# Altium PCB TC-temp-logger-base.PcbDoc (part 1 of 5)
Units mil, origin at the board's own origin, x right, y up, seen from the top; angles counter-clockwise.
Board outline 6370.08 x 6889.76 mil, 4 copper layers (Top Layer, Layer 2, Layer 1, Bottom Layer), stack 61.581 mil thick; 216 components, 163 nets, 792 pads, 3713 vias.
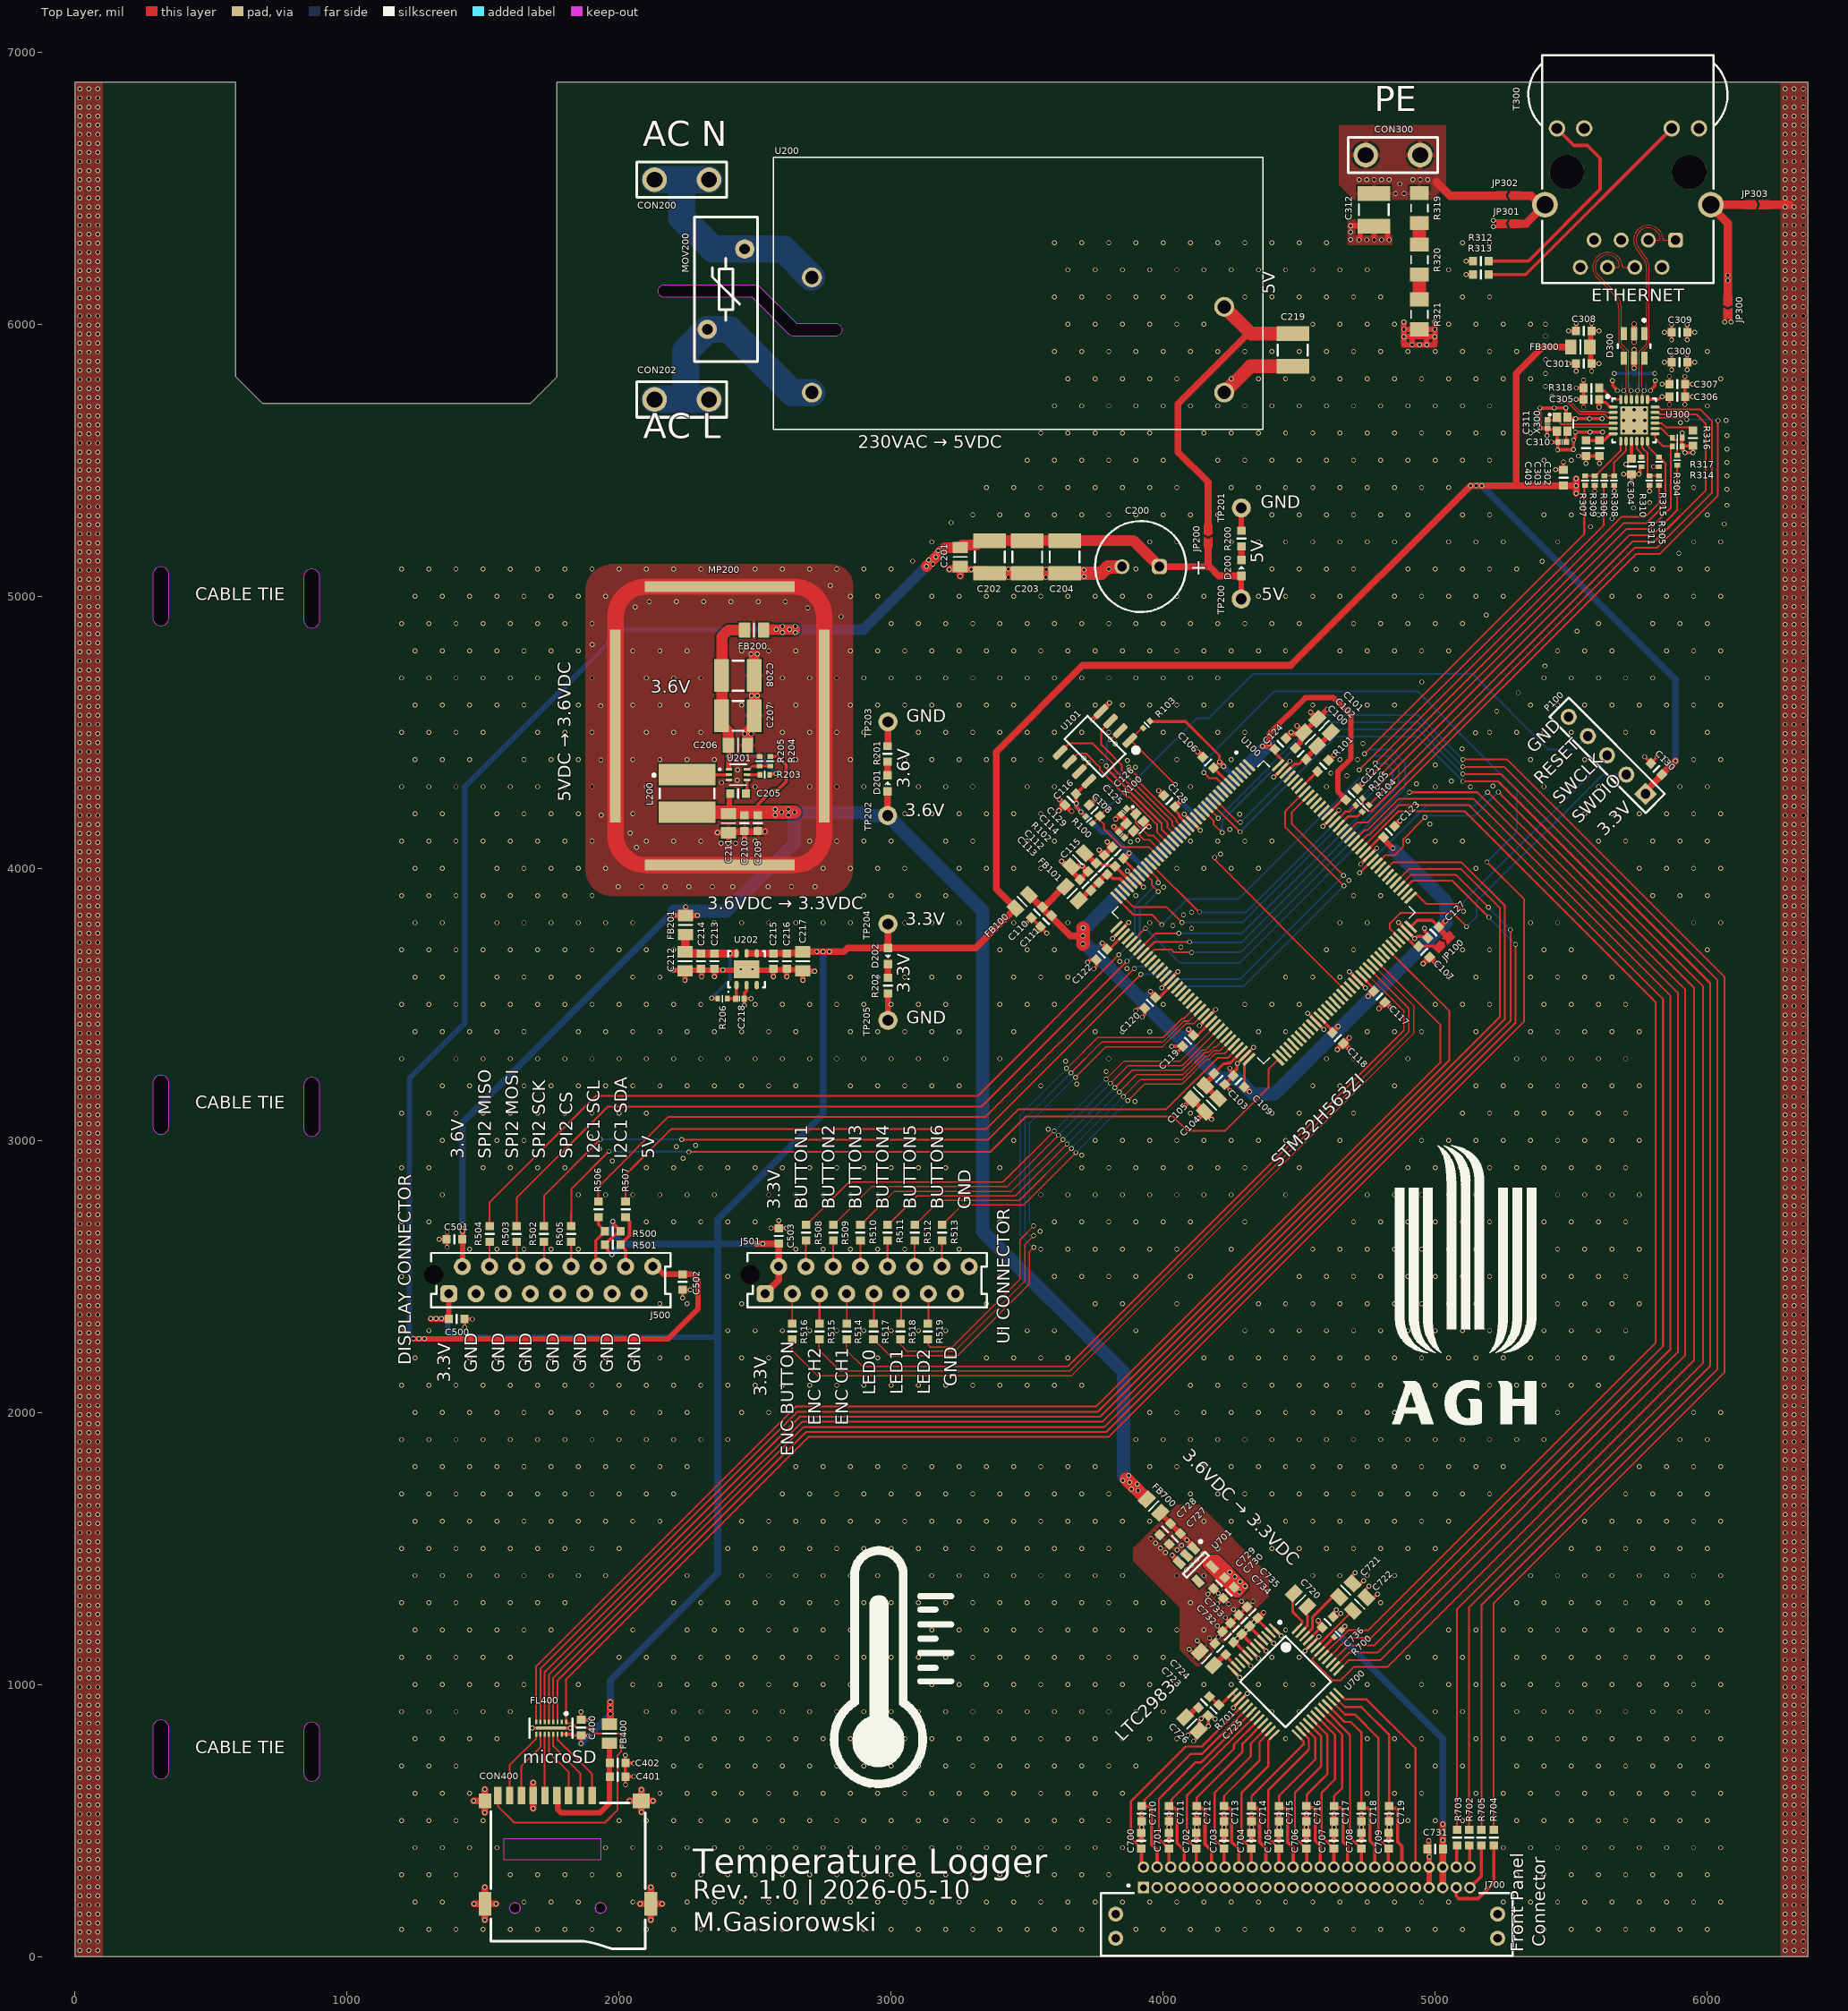
[diagram p0: Top Layer view]
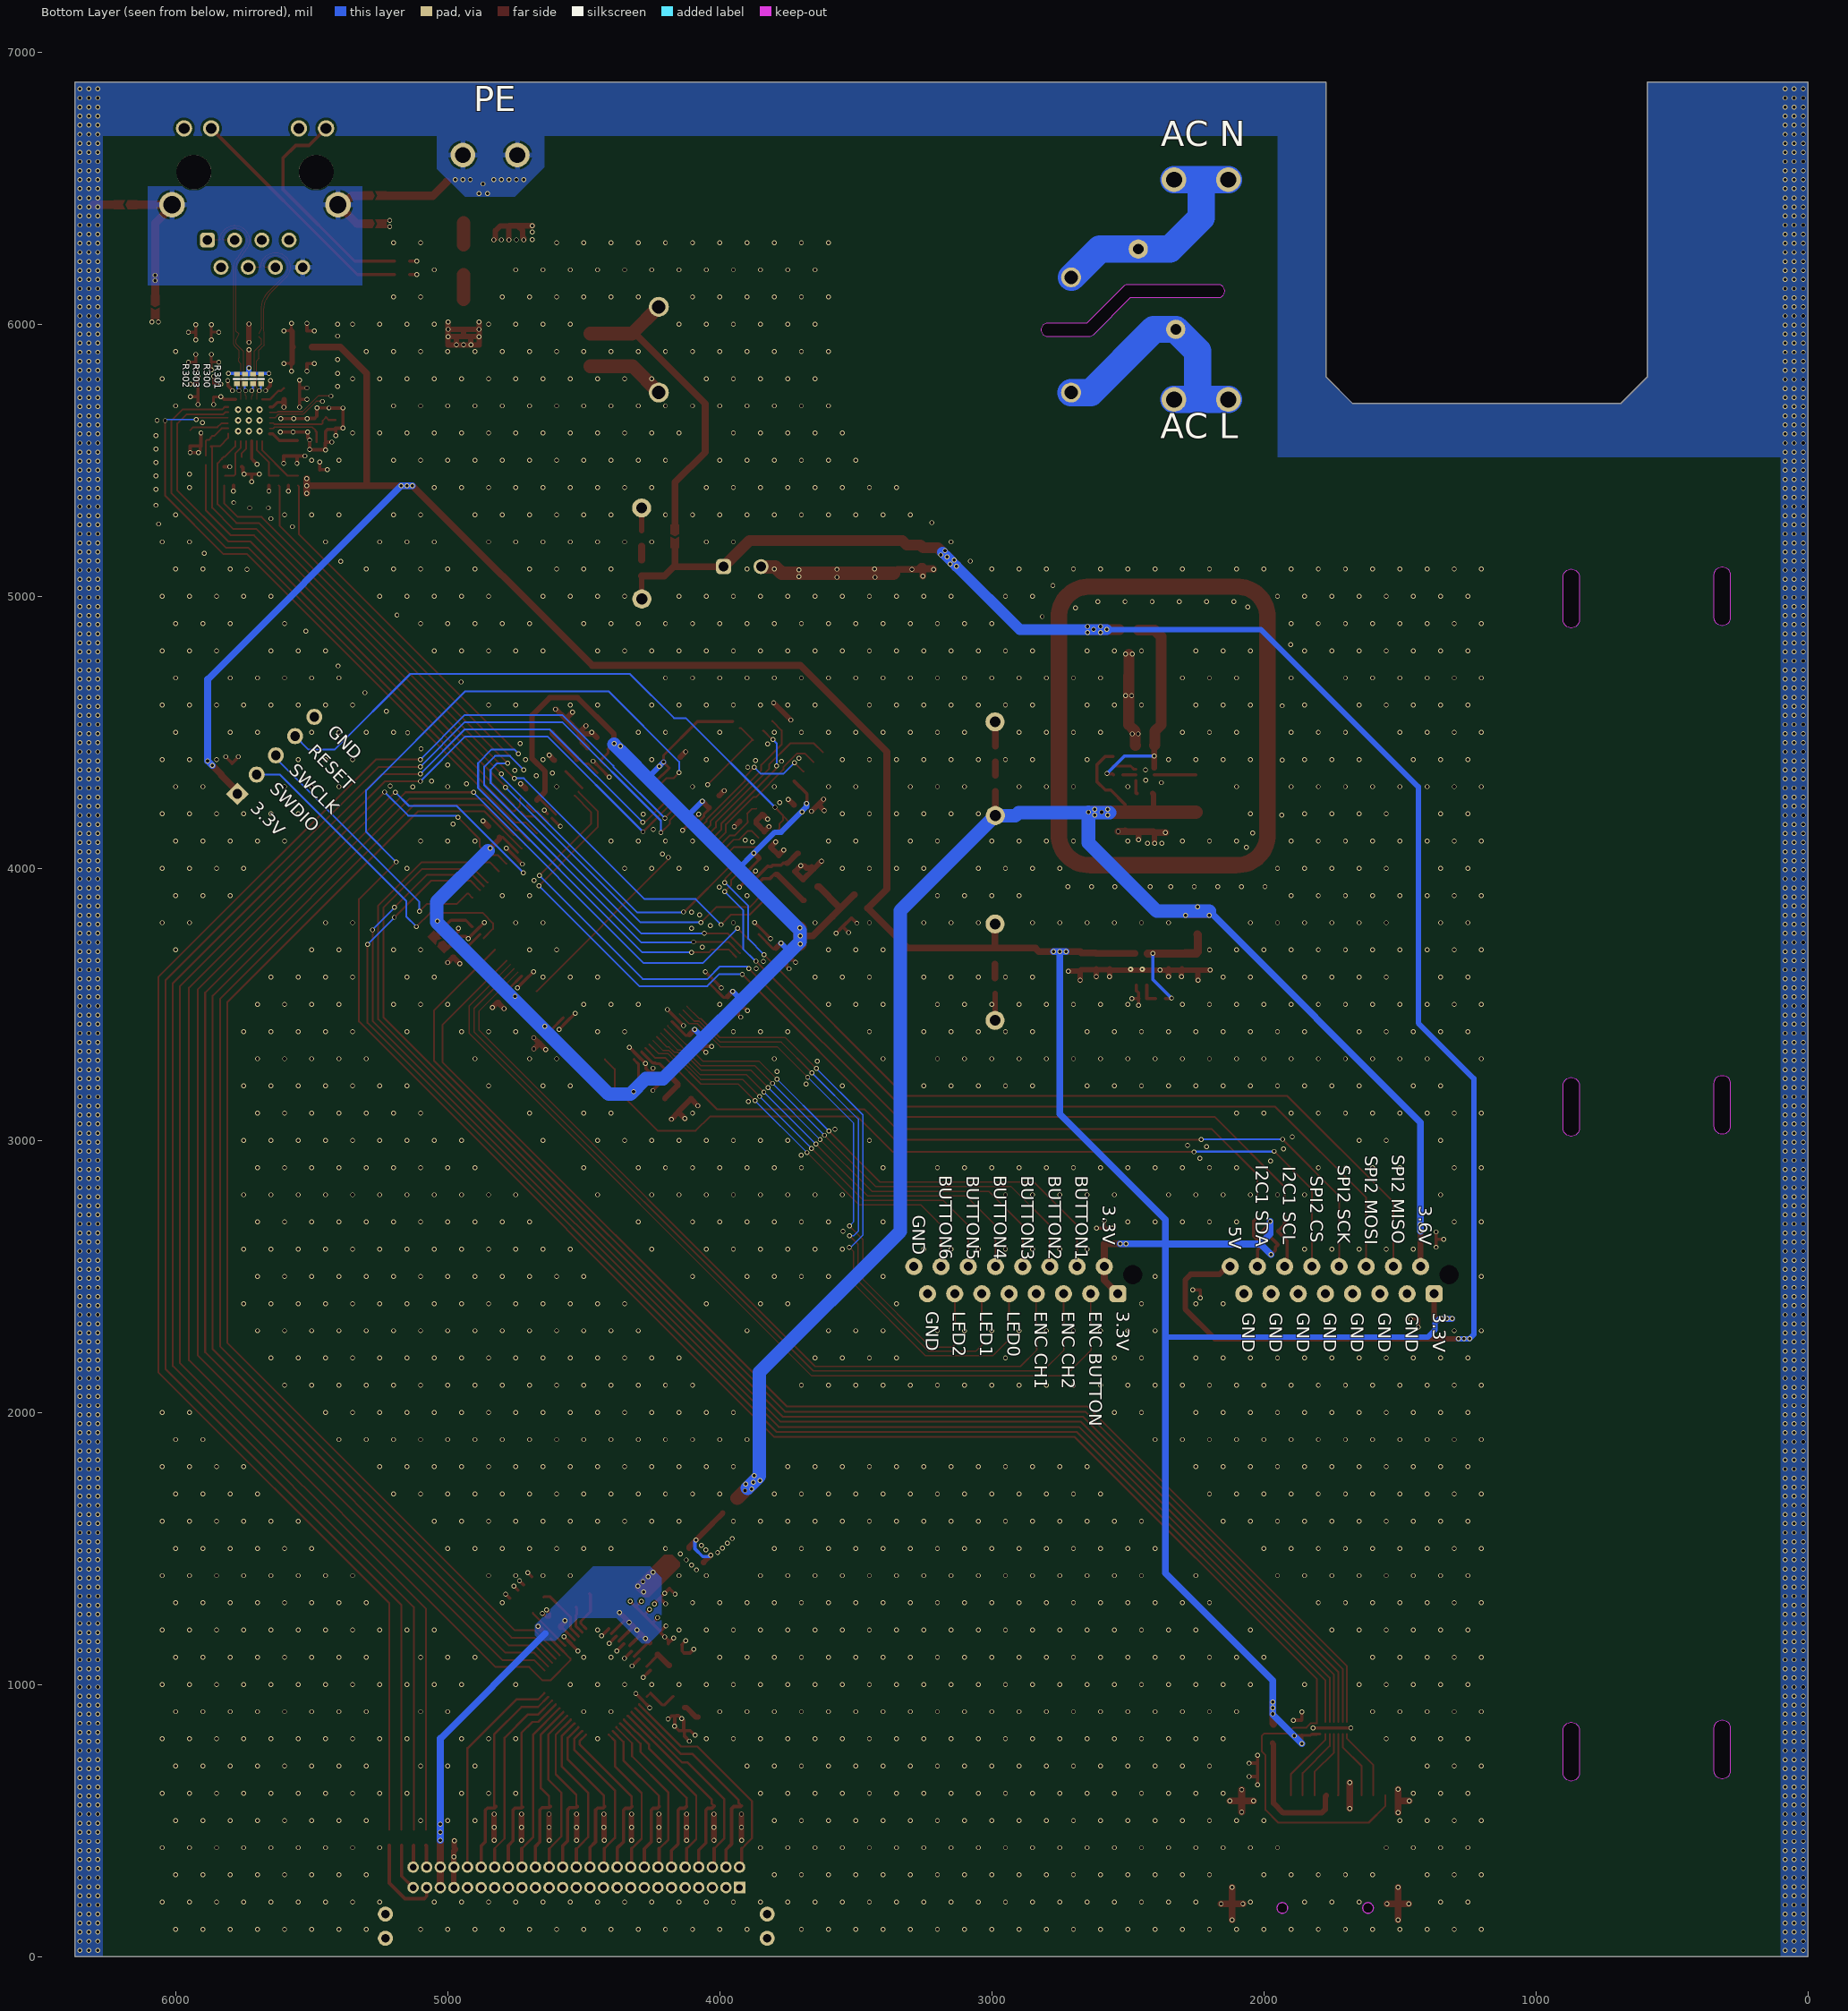
[diagram p1: Bottom Layer view, seen from below]
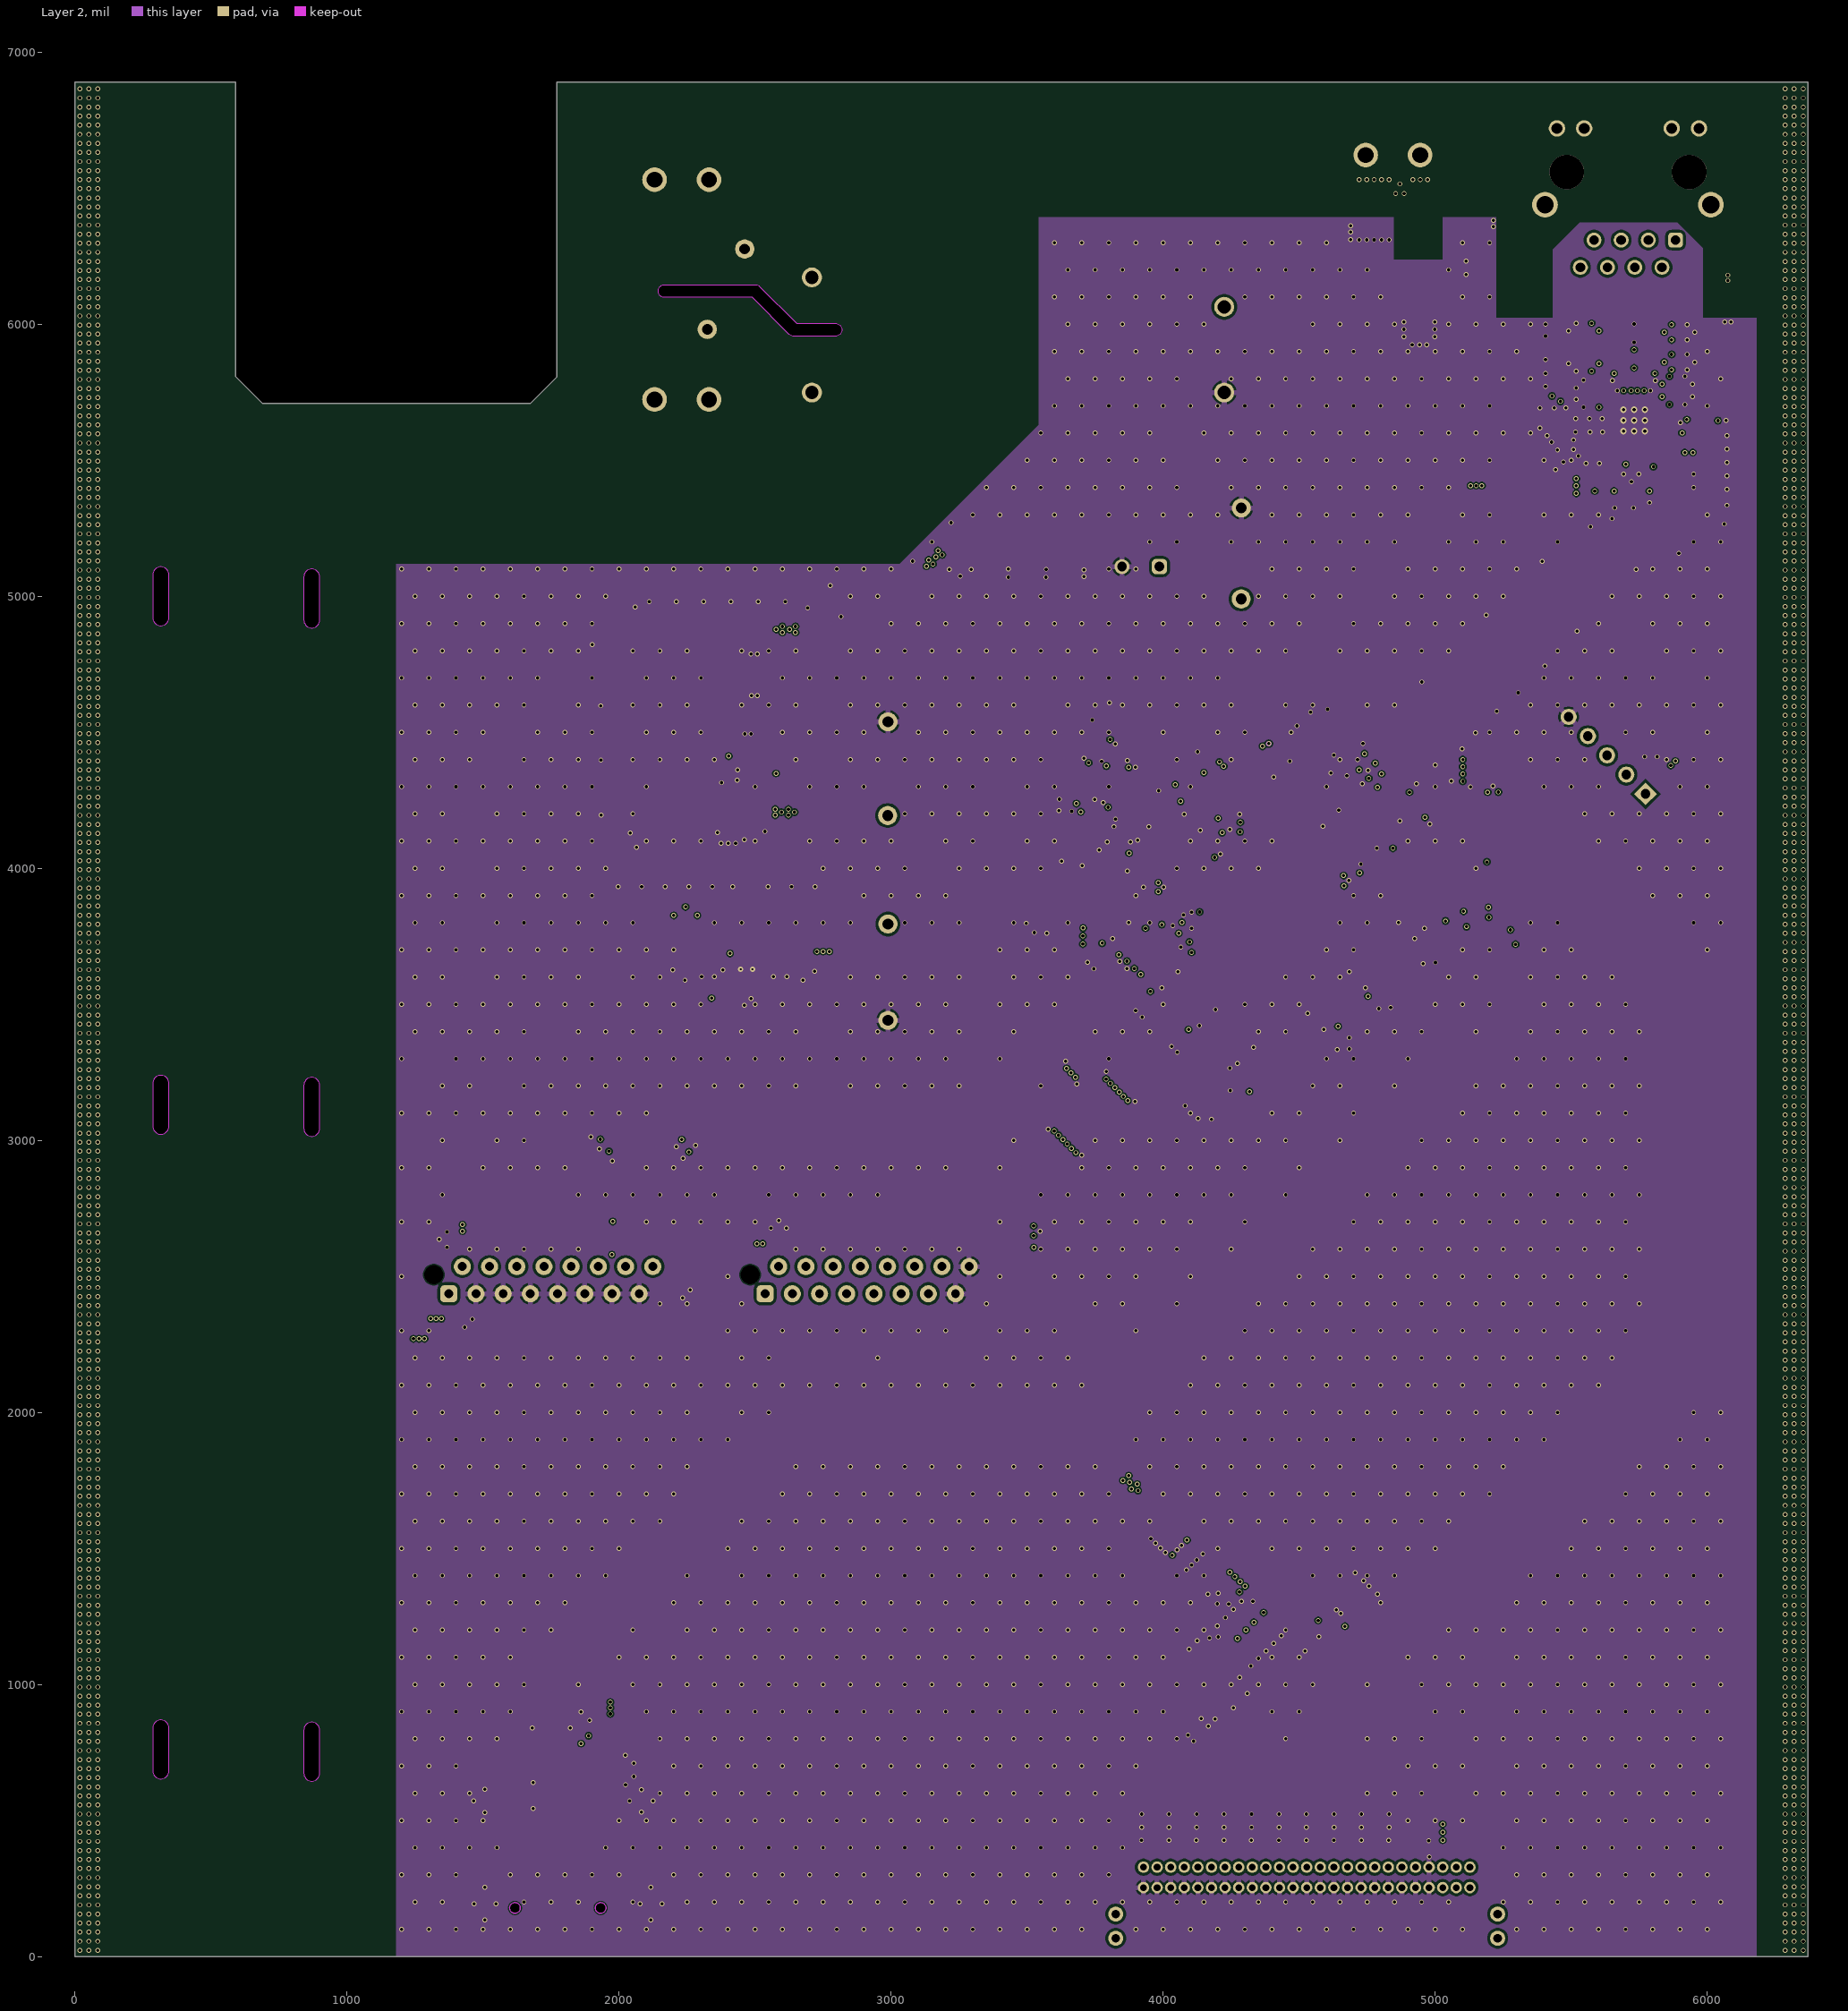
[diagram p2: Layer 2]
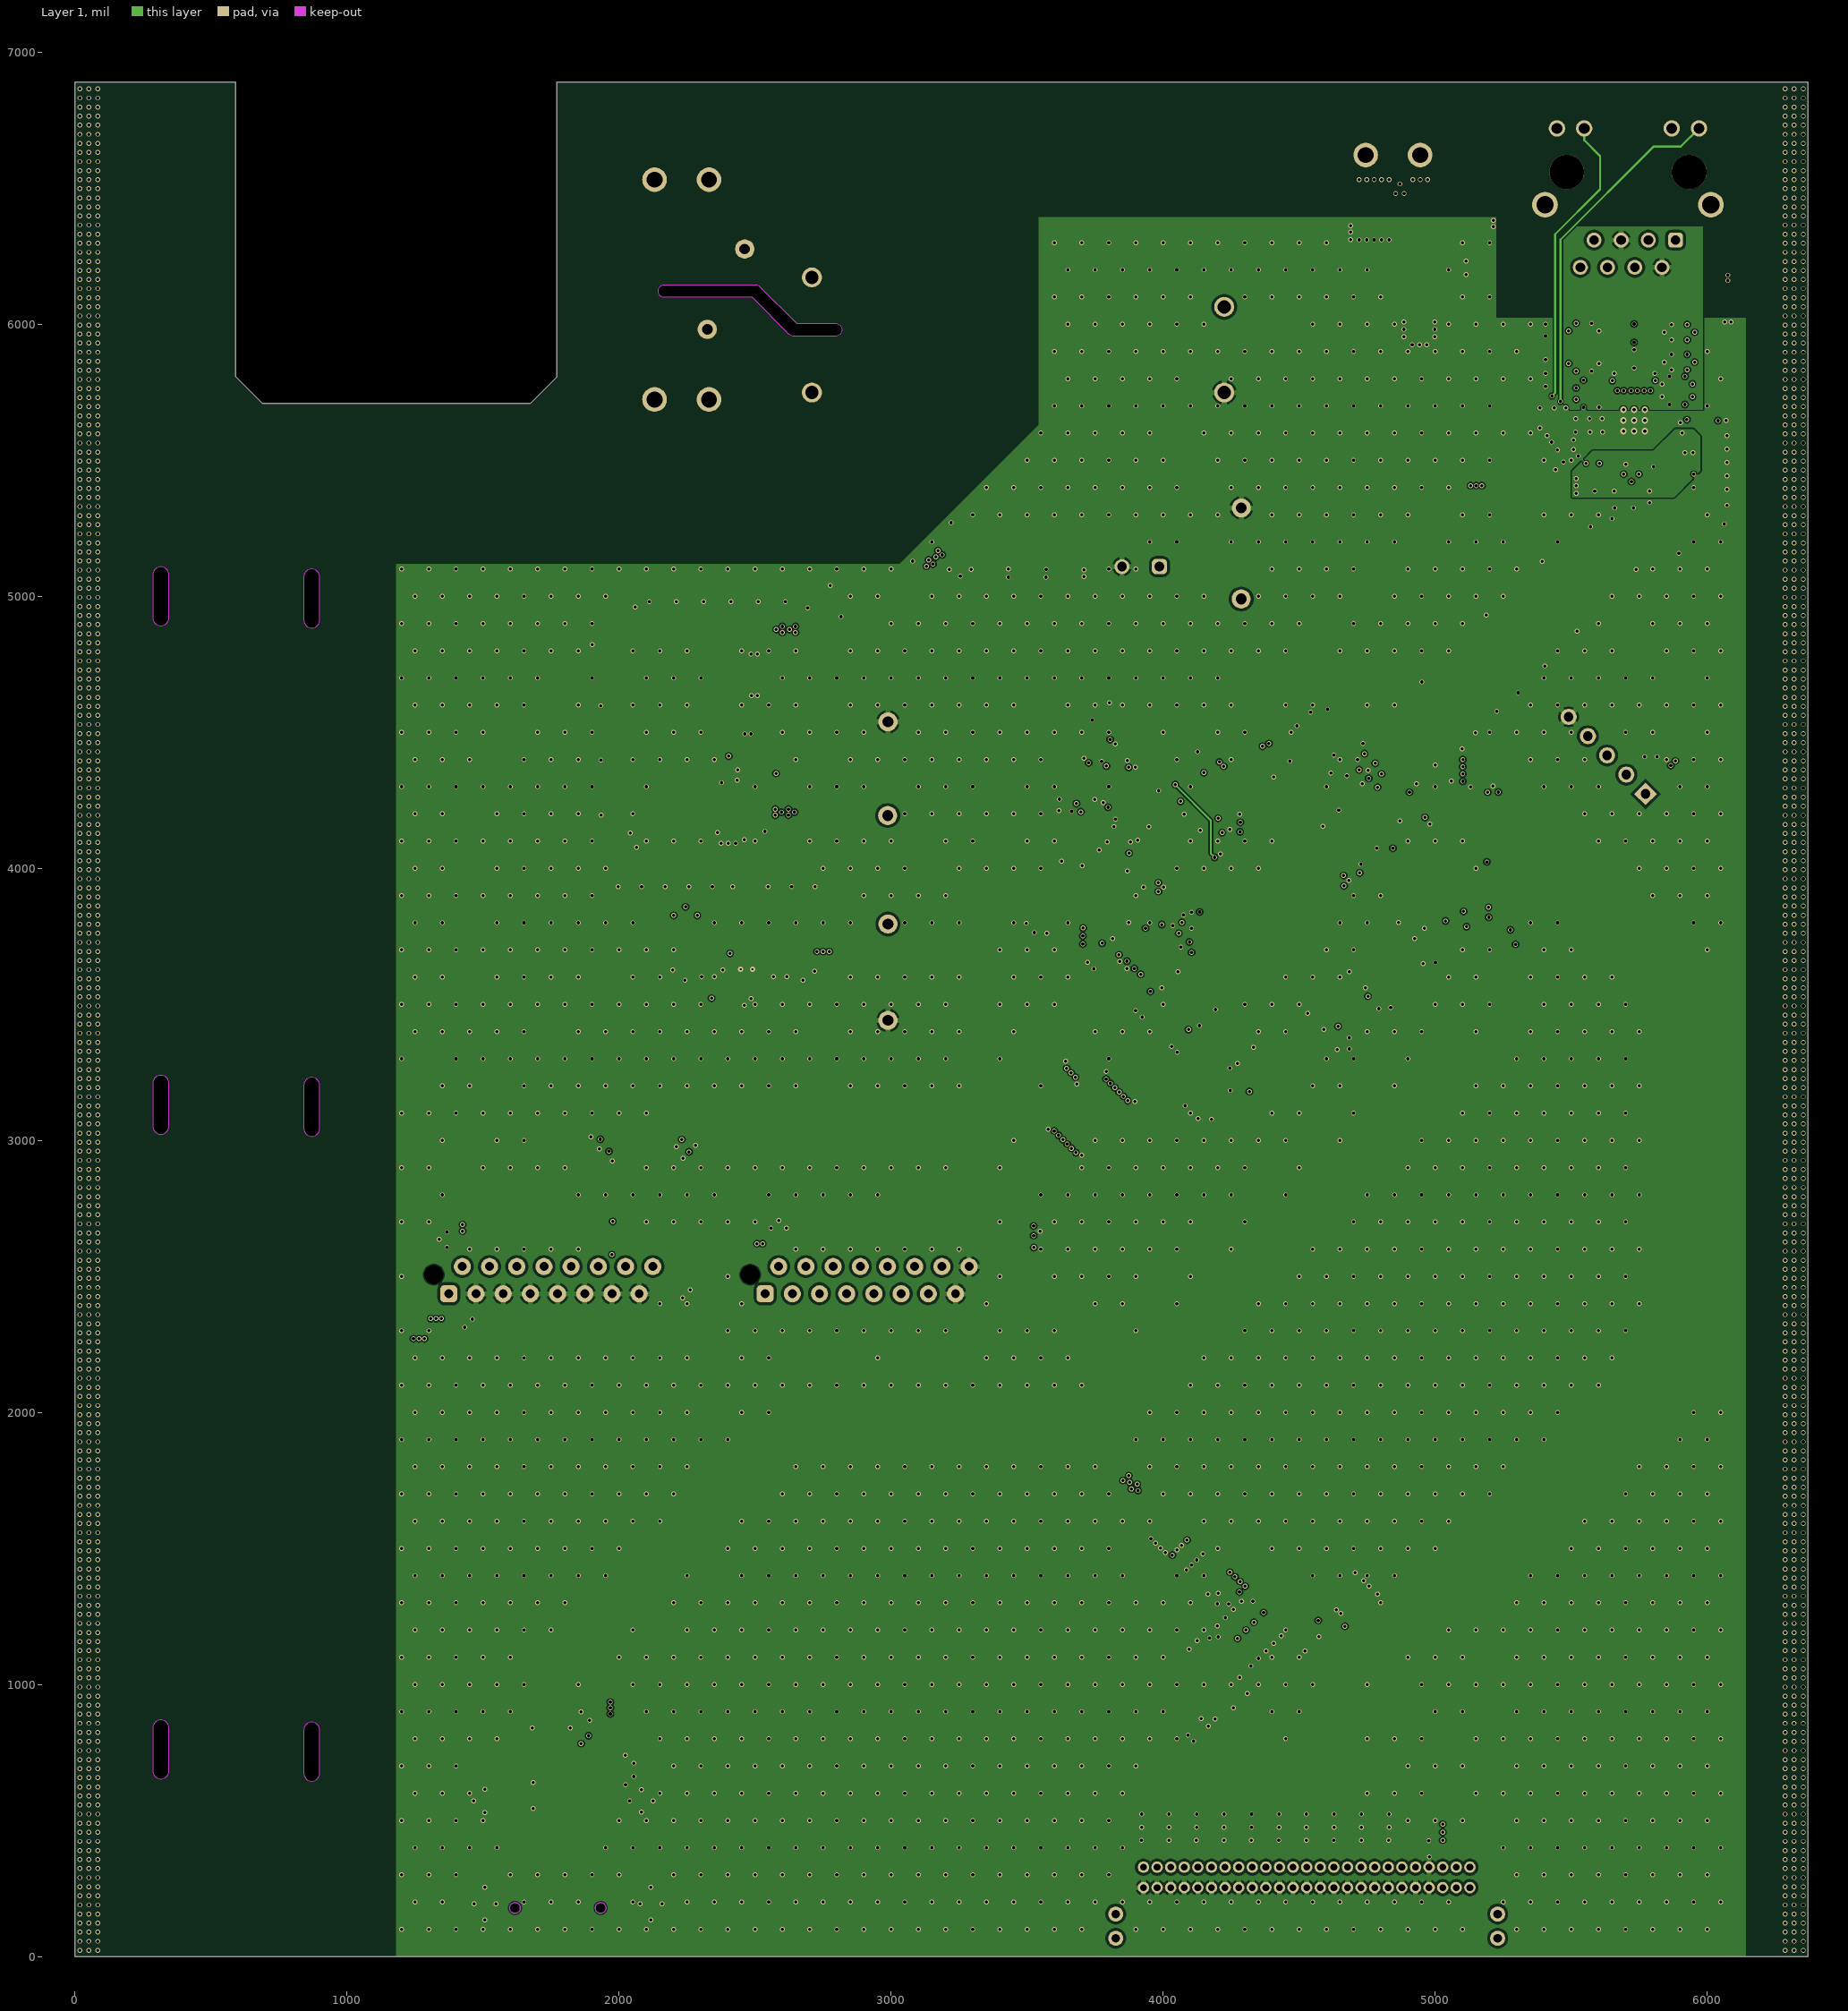
[diagram p3: Layer 1]
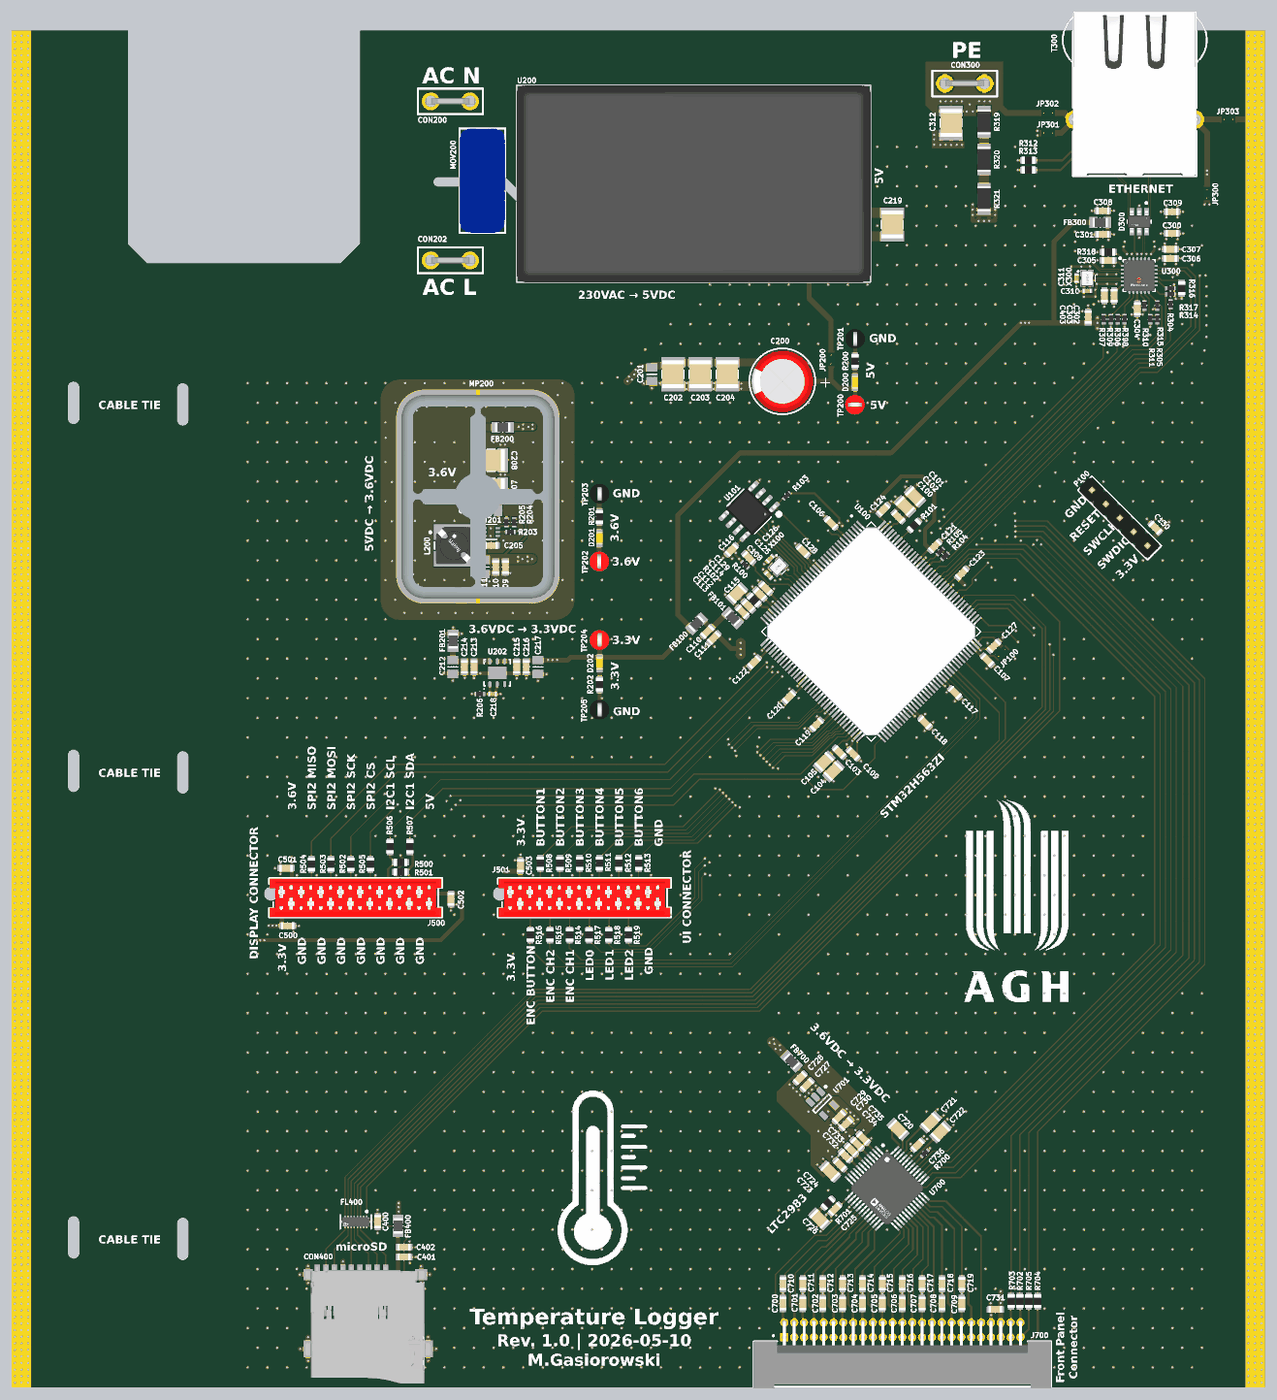
[diagram p7: 3D render of the assembled board from above, using the file's embedded part models]
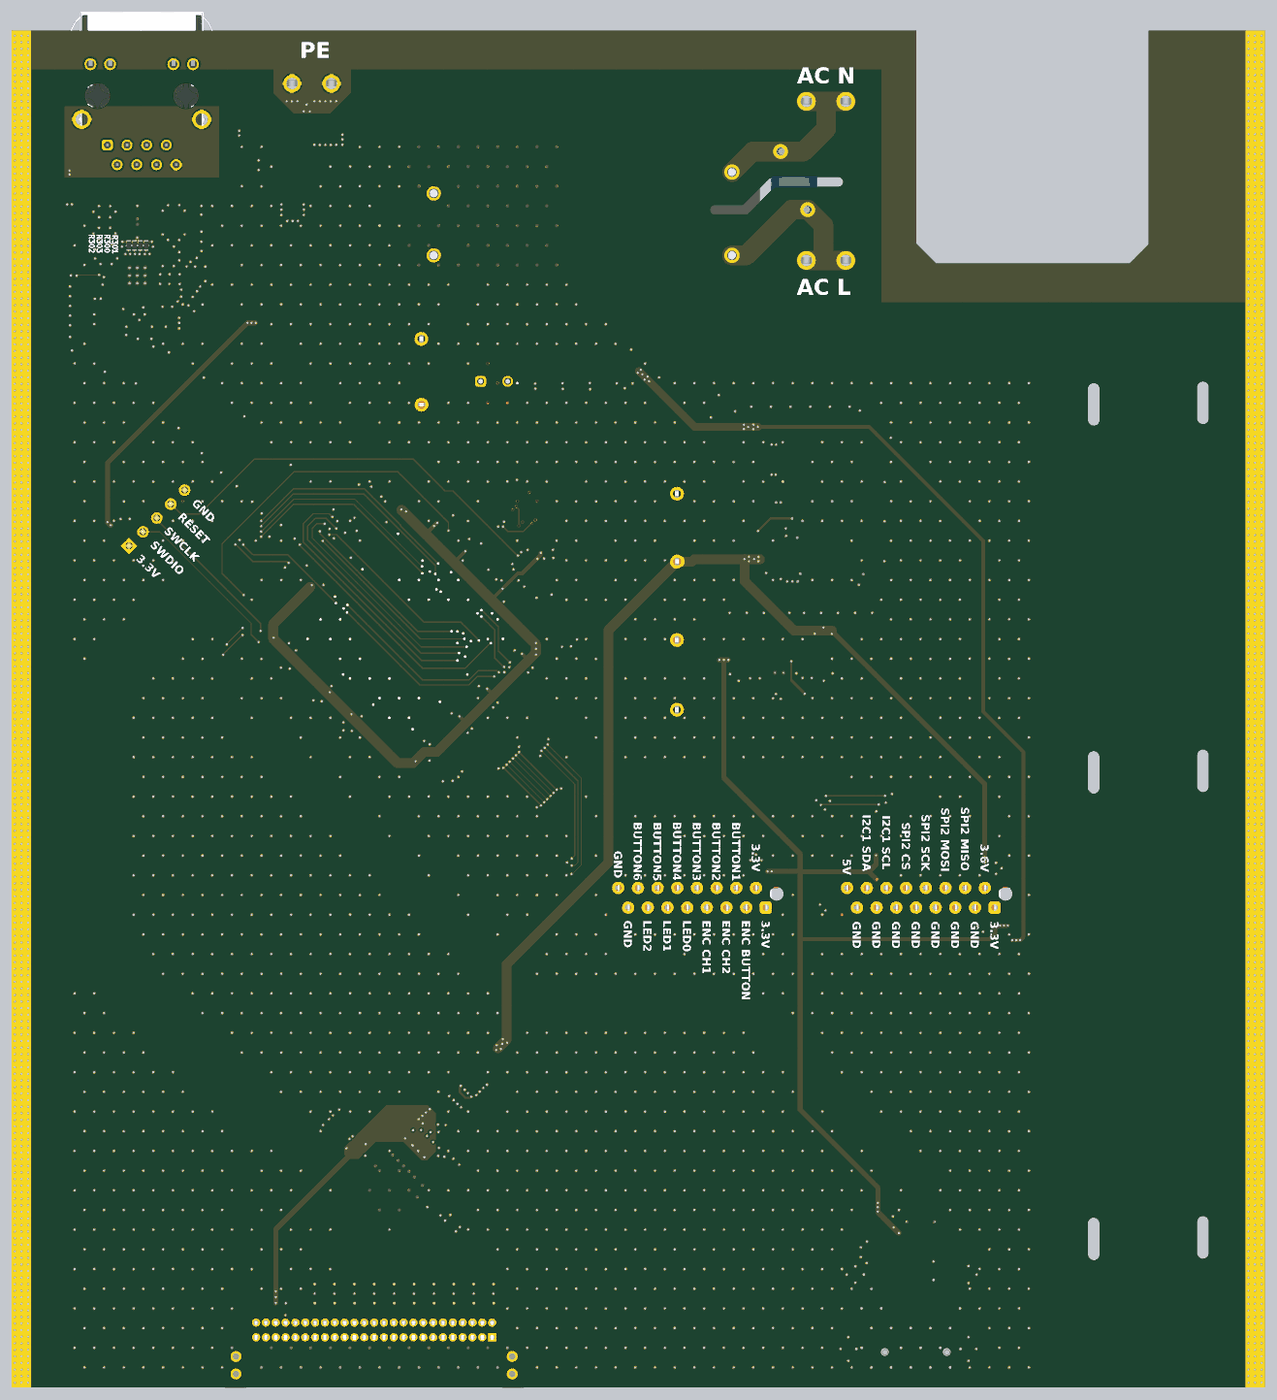
[diagram p8: 3D render of the assembled board from below, using the file's embedded part models]

## Layer stack, top to bottom
Top Solder: solder mask 0.5, Solder Resist, Dk 3.8
Top Layer: signal copper 1.378
Dielectric 1: prepreg 3.913, 3313, Dk 4.1
Layer 2: signal copper 0.598
Core 1: core 49.803, FR-4, Dk 4.5
Layer 1: signal copper 0.598
Dielectric 2: prepreg 3.913, 3313, Dk 4.1
Bottom Layer: signal copper 1.378
Board Layer Stack Bottom Solder: solder mask 0.5, Solder Resist, Dk 3.8

## Board outline
0,0 0,6889.76 590.55,6889.76 590.55,5807.09 688.98,5708.66 1673.23,5708.66 1771.65,5807.09 1771.65,6889.76 6370.08,6889.76 6370.08,0
cut-out: 2167.32,6098.41 cw(c2167.32,6122.05) 2167.32,6145.68 2500,6145.68 cw(c2500,6122.05) 2516.71,6138.76 2652.02,6003.45 2795.28,6003.45 cw(c2795.28,5979.81) 2818.91,5979.81 cw(c2795.28,5979.81) 2795.28,5956.18 2642.23,5956.18 cw(c2642.23,5979.81) 2625.52,5963.1 2490.21,6098.41
cut-out: 840.54,3044.18 ccw(c870.08,3044.18) 899.62,3044.18 899.62,3201.66 ccw(c870.08,3201.66) 840.54,3201.66
cut-out: 285.42,3052.06 ccw(c314.96,3052.06) 344.5,3052.06 344.5,3209.54 ccw(c314.96,3209.54) 285.42,3209.54
cut-out: 840.54,674.3 ccw(c870.08,674.3) 899.62,674.3 899.62,831.78 ccw(c870.08,831.78) 840.54,831.78
cut-out: 285.42,682.18 ccw(c314.96,682.18) 344.5,682.18 344.5,839.66 ccw(c314.96,839.66) 285.42,839.66
cut-out: 285.42,4921.26 ccw(c314.96,4921.26) 344.5,4921.26 344.5,5078.74 ccw(c314.96,5078.74) 285.42,5078.74
cut-out: 840.54,4913.39 ccw(c870.08,4913.39) 899.62,4913.39 899.62,5070.87 ccw(c870.08,5070.87) 840.54,5070.87

## Design rules (kind name [scope] priority, off if disabled: settings)
Clearance [All] p1: gap=5 ignorepadtopadclearanceinfootprint=FALSE except(3.15: Arc-SMDPad Track-SMDPad; 3.94: SMDPad-SMDPad; 4: Arc-Arc Arc-Track Arc-Text Arc-Hole Track-Track Track-Text Track-Hole SMDPad-Text SMDPad-Hole THPad-Text THPad-Hole Via-Text Via-Hole Fill-Text Fill-Hole Poly-Text Poly-Hole Region-Text Region-Hole Text-Text Text-Hole; 4.72: THPad-THPad; 4.88: Arc-Via Track-Via SMDPad-Via THPad-Via Via-Via; 7.87: Arc-THPad Track-THPad SMDPad-THPad; 10: THPad-Fill THPad-Poly THPad-Region)
ComponentClearance [All] p1: gap=7.87 collisioncheckmode=3 verticalgap=7.87 showdistances=FALSE
DiffPairsRouting [All] p1: maxlimit=5 minlimit=5 mostfreqgap=5 toplayer_minwidth=3.98 toplayer_maxwidth=3.98 toplayer_prefwidth=3.98 midlayer1_minwidth=3.71 midlayer1_maxwidth=3.71 midlayer1_prefwidth=3.71 midlayer2_minwidth=3.03 midlayer2_maxwidth=3.03 midlayer2_prefwidth=3.03 bottomlayer_minwidth=3.98 bottomlayer_maxwidth=3.98 bottomlayer_prefwidth=3.98 impedanceprofiledriven=TRUE impedanceprofileid={BE86F7EC-61BB-4EF0-B714-61C3064F6A90} impedanceprofilevalue=100.000000 maxuncoupledlength=500
HoleSize [All] p1: absolutevalues=TRUE maxlimit=314.96 minlimit=5.91 maxpercent=80.000 minpercent=20.000
HoleSize Testpoint [All] p2: absolutevalues=TRUE maxlimit=100 minlimit=1 maxpercent=80.000 minpercent=20.000
HoleSize TestPointUsage [All] p3: absolutevalues=TRUE maxlimit=100 minlimit=1 maxpercent=80.000 minpercent=20.000
HoleToHoleClearance [All] p1: gap=7.87 allowstackedmicrovias=TRUE
MinimumAnnularRing MinimumAnnularRing_via [IsVia] p1: minimumring=2.95
MinimumAnnularRing [All] p2: minimumring=5.12
MinimumSolderMaskSliver [All] p1: minsoldermaskwidth=0
PlaneClearance [All] p1: clearance=10
PolygonConnect [All] p1: thpad.connectstyle=Relief thpad.reliefconductorwidth=20 thpad.reliefentries=4 thpad.polygonreliefangle="90 Angle" thpad.airgapwidth=8 smdpad.connectstyle=Relief smdpad.reliefconductorwidth=12 smdpad.reliefentries=4 smdpad.polygonreliefangle="90 Angle" smdpad.airgapwidth=6 via.connectstyle=Direct via.reliefconductorwidth=20 via.reliefentries=4 via.polygonreliefangle="45 Angle" via.airgapwidth=10
RoutingVias [All] p1: holewidth=11.81 width=17.72 viastyle="Through Hole" minholewidth=11.81 minwidth=11.81 maxholewidth=118.11 maxwidth=236.22
SilkToSilkClearance [All] p1: silktosilkclearance=3.94
SilkToSolderMaskClearance [IsPad] p1: minsilkscreentomaskgap=2.13 clearancetoexposedcopper=TRUE
SolderMaskExpansion SolderMaskExpansion_VIA [IsVia] p1: expansion=4 istentingtop=TRUE
SolderMaskExpansion [All] p2: expansion=2 istentingtop=FALSE
SupplyNets "Schematic Supply Nets_7" [InNet('5V-PS')] p1: voltage=0.000
SupplyNets "Schematic Supply Nets_6" [InNet('3V3-LTC')] p2: voltage=0.000
SupplyNets "Schematic Supply Nets_5" [InNet('3V6')] p3: voltage=0.000
SupplyNets "Schematic Supply Nets_4" [InNet('GND')] p4: voltage=0.000
SupplyNets "Schematic Supply Nets_3" [InNet('SHGND')] p5: voltage=0.000
SupplyNets "Schematic Supply Nets_2" [InNet('AC_PE')] p6: voltage=0.000
SupplyNets "Schematic Supply Nets_1" [InNet('VDD-3V3')] p7: voltage=0.000
SupplyNets "Schematic Supply Nets" [InNet('3V3-STM32')] p8: voltage=0.000
Width Width_50Ohm [InNetClass('50')] p1: maxlimit=14.47 minlimit=3.5 preferedwidth=14.47
Width [All] p2: maxlimit=250 minlimit=3.5 preferedwidth=8 minimp=40.000000 maximp=100.000000 favimp=52.000000
22 further rules are at their usual default settings.

## Classes and differential pairs
component class LTC-SHEET: C700 C701 C702 C703 C704 C705 C706 C707 C708 C709 C710 C711 C712 C713 C714 C715 C716 C717 C718 C719 C720 C721 C722 C723 C724 C725 C726 C727 C728 C729 C730 C731 C732 C733 C734 C735 C736 FB700 J700 R700 R701 R702 R703 R704 R705 U700 U701
component class SD-SHEET: C400 C401 C402 C403 CON400 FB400 FL400
component class PS-SHEET: C200 C201 C202 C203 C204 C205 C206 C207 C208 C209 C210 C211 C212 C213 C214 C215 C216 C217 C218 C219 CON200 CON202 D200 D201 D202 FB200 FB201 JP200 L200 MOV200 MP200 R200 R201 R202 R203 R204 R205 R206 TP200 TP201 TP202 TP203 TP204 TP205 U200 U201 U202
component class CON-SHEET: C500 C501 C502 C503 J500 J501 R500 R501 R502 R503 R504 R505 R506 R507 R508 R509 R510 R511 R512 R513 R514 R515 R516 R517 R518 R519
component class EHT-SHEET: C300 C301 C302 C303 C304 C305 C306 C307 C308 C309 C310 C311 C312 CON300 D300 FB300 JP300 JP301 JP302 JP303 R300 R301 R302 R303 R304 R305 R306 R307 R308 R309 R310 R311 R312 R313 R314 R315 R316 R317 R318 R319 R320 R321 T300 U300 X300
component class STM32-SHEET: C100 C101 C102 C103 C104 C105 C106 C107 C108 C109 C110 C111 C112 C113 C114 C115 C116 C117 C118 C119 C120 C121 C122 C123 C124 C125 C126 C127 C128 C129 C130 FB100 FB101 JP100 P100 R100 R101 R102 R103 R104 R105 U100 U101 X100
differential pair TX_4: +TX_4_P -TX_4_N
differential pair RX_4: +RX_4_P -RX_4_N

## Components (designator, comment, footprint, x,y, rotation, side; value= is the part's Value field where it differs from the comment)
C100 "Ceramic X7R" C_0603_1608 4505.98,4421.18 r135 top value=100nF
C101 "Ceramic X7S" C_0805_2012 4591.29,4524.43 r135 top value=2.2uF
C102 "Ceramic X7S" C_0805_2012 4541.29,4474.43 r135 top value=2.2uF
C103 "Ceramic X7R" C_0603_1608 4206.42,3225.63 r315 top value=100nF
C104 "Ceramic X7S" C_0805_2012 4177.57,3129.49 r225 top value=2.2uF
C105 "Ceramic X7S" C_0805_2012 4130.22,3176.84 r225 top value=2.2uF
C106 "Ceramic X7R" C_0603_1608 4165.35,4388.78 r135 top value=100nF
C107 "Ceramic X7R" C_0603_1608 4959.28,3693.13 r315 top value=100nF
C108 "Ceramic X7R" C_0603_1608 3747.53,4212.59 r135 top value=100nF
C109 "Ceramic X5R" C_0603_1608 4277.56,3216.78 r135 top value=22uF
C110 "Ceramic X5R" C_0603_1608 3536.3,3837.95 r225 top value=22uF
C111 "Ceramic X7R" C_0603_1608 3569.25,3805.91 r225 top value=100nF
C112 "Ceramic X7R" C_0603_1608 3744.1,3968.31 r135 top value=100nF
C113 "Ceramic X5R" C_0603_1608 3714.1,3938.31 r135 top value=22uF
C114 "Ceramic X7R" C_0603_1608 3803.3,4027.51 r135 top value=100nF
C115 "Ceramic X7S" C_0805_2012 3686.61,4030.83 r225 top value=2.2uF
C116 "Ceramic X7R" C_0603_1608 3659.1,4253.31 r225 top value=100nF
C117 "Ceramic X7R" C_0603_1608 4794.28,3528.13 r315 top value=100nF
C118 "Ceramic X7R" C_0603_1608 4641.78,3375.63 r315 top value=100nF
C119 "Ceramic X7R" C_0603_1608 4091.42,3365.63 r225 top value=100nF
C120 "Ceramic X7R" C_0603_1608 3951.42,3505.63 r225 top value=100nF
C121 "Ceramic X7R" C_0603_1608 4692.62,4271.83 r45 top value=100nF
C122 "Ceramic X7R" C_0603_1608 3773.92,3683.13 r225 top value=100nF
C123 "Ceramic X7R" C_0603_1608 4830.12,4134.33 r45 top value=100nF
C124 "Ceramic X7R" C_0603_1608 4431.1,4457.68 r45 top value=100nF
C125 "Ceramic C0G" C_0402_1005 3846.94,4123.03 r135 top value=5.6pF
C126 "Ceramic C0G" C_0402_1005 3854.82,4208.66 r225 top value=5.6pF
C127 "Ceramic X7R" C_0603_1608 4993.13,3764.27 r225 top value=100nF
C128 "Ceramic X7R" C_0603_1608 4022.64,4247.05 r135 top value=100nF
C129 "Ceramic X7R" C_0603_1608 3833.3,4057.51 r135 top value=100nF
C130 "Ceramic X7R" C_0603_1608 5812.99,4365.16 r135 top value=100nF
C200 "1500µF" WCAP-ATG5_D8H20 3917.32,5109.26 r0 top
C201 "-" C_NC_0805_2012 3253.93,5144.69 r270 top value=NC
C202 "Ceramic X7R Low ESR" C_1210_3225 3362.2,5144.69 r270 top value=22uF
C203 "Ceramic X7R Low ESR" C_1210_3225 3499.99,5144.69 r270 top value=22uF
C204 "Ceramic X7R Low ESR" C_1210_3225 3637.79,5144.69 r270 top value=22uF
C205 "Ceramic X7R" C_0603_1608 2437.02,4275.29 r180 top value=100nF
C206 "-" C_NC_0805_2012 2437.02,4452.45 r0 top value=NC
C207 "Ceramic X7R Low ESR" C_1210_3225 2437.02,4560.72 r0 top value=22uF
C208 "Ceramic X7R Low ESR" C_1210_3225 2437.02,4708.36 r0 top value=22uF
C209 "Ceramic X5R" C_0603_1608 2509.84,4165.79 r270 top value=22uF
C210 "Ceramic X5R" C_0603_1608 2460.63,4165.79 r270 top value=22uF
C211 "-" C_NC_0805_2012 2401.57,4165.79 r270 top value=NC
C212 "-" C_NC_0805_2012 2242.13,3658.46 r270 top value=NC
C213 "Ceramic X5R" C_0603_1608 2350.39,3658.46 r270 top value=22uF
C214 "Ceramic X5R" C_0603_1608 2301.18,3658.46 r270 top value=22uF
C215 "Ceramic X5R" C_0603_1608 2566.93,3658.46 r270 top value=22uF
C216 "Ceramic X5R" C_0603_1608 2616.14,3658.46 r270 top value=22uF
C217 "-" C_NC_0805_2012 2675.2,3658.46 r270 top value=NC
C218 "Ceramic X7R" C_0402_1005 2444.49,3520.67 r0 top value=100nF
C219 "Ceramic X7R Low ESR" C_1210_3225 4476.38,5905.51 r270 top value=22uF
C300 "Ceramic X7R" C_0603_1608 5897.8,5860.71 r0 top value=100nF
C301 "Ceramic X5R" C_0603_1608 5546.34,5855.71 r180 top value=22uF
C302 "Ceramic C0G" C_0603_1608 5603.35,5544.29 r270 top value=470pF
C303 "Ceramic X7R" C_0603_1608 5554.13,5544.29 r270 top value=1uF
C304 "Ceramic X7R" C_0603_1608 5721.46,5477.36 r270 top value=100nF
C305 "Ceramic X7R" C_0603_1608 5573.82,5723.42 r180 top value=100nF
C306 "Ceramic X7R" C_0603_1608 5889.76,5733.27 r0 top value=100nF
C307 "Ceramic X7R" C_0603_1608 5889.76,5780.39 r0 top value=100nF
C308 "Ceramic X7R" C_0603_1608 5546.34,5975.71 r180 top value=100nF
C309 "Ceramic X7R" C_0603_1608 5897.8,5970.71 r0 top value=100nF
C310 "Ceramic C0G" C_0402_1005 5466.73,5567.83 r180 top value=5.6pF
C311 "Ceramic C0G" C_0402_1005 5412.8,5632.83 r270 top value=5.6pF
C312 "Ceramic X7R" C_1210_3225 4774.61,6420.87 r270 top value=1nF
C400 "Ceramic X7R" C_0603_1608 1860.55,841.26 r90 top value=100nF
C401 "Ceramic X5R" C_0603_1608 1994.33,661.26 r0 top value=22uF
C402 "Ceramic X7R" C_0603_1608 1994.33,711.26 r0 top value=100nF
C403 "Ceramic X5R" C_0603_1608 5471.46,5436.02 r90 top value=22uF
C500 "Ceramic X5R" C_0603_1608 1402.56,2343.5 r0 top value=22uF
C501 "Ceramic X5R" C_0603_1608 1394.68,2635.83 r180 top value=22uF
C502 "Ceramic X5R" C_0603_1608 2233.27,2479.33 r270 top value=22uF
C503 "Ceramic X5R" C_0603_1608 2586.59,2648.62 r90 top value=22uF
C700 "Ceramic C0G" C_0603_1608 3920,425 r90 top value=100pF
C701 "Ceramic C0G" C_0603_1608 4021.05,425 r90 top value=100pF
C702 "Ceramic C0G" C_0603_1608 4122.11,425 r90 top value=100pF
C703 "Ceramic C0G" C_0603_1608 4223.16,425 r90 top value=100pF
C704 "Ceramic C0G" C_0603_1608 4324.21,425 r90 top value=100pF
C705 "Ceramic C0G" C_0603_1608 4425.26,425 r90 top value=100pF
C706 "Ceramic C0G" C_0603_1608 4526.32,425 r90 top value=100pF
C707 "Ceramic C0G" C_0603_1608 4627.37,425 r90 top value=100pF
C708 "Ceramic C0G" C_0603_1608 4728.42,425 r90 top value=100pF
C709 "Ceramic C0G" C_0603_1608 4829.47,425 r90 top value=100pF
C710 "Ceramic C0G" C_0603_1608 3920.53,525 r270 top value=100pF
C711 "Ceramic C0G" C_0603_1608 4021.58,525 r270 top value=100pF
C712 "Ceramic C0G" C_0603_1608 4122.63,525 r270 top value=100pF
C713 "Ceramic C0G" C_0603_1608 4223.68,525 r270 top value=100pF
C714 "Ceramic C0G" C_0603_1608 4324.74,525 r270 top value=100pF
C715 "Ceramic C0G" C_0603_1608 4425.79,525 r270 top value=100pF
C716 "Ceramic C0G" C_0603_1608 4526.84,525 r270 top value=100pF
C717 "Ceramic C0G" C_0603_1608 4627.89,525 r270 top value=100pF
C718 "Ceramic C0G" C_0603_1608 4728.95,525 r270 top value=100pF
C719 "Ceramic C0G" C_0603_1608 4830,525 r270 top value=100pF
C720 "Ceramic X7R" C_0805_2012 4505,1310 r315 top value=10uF
C721 "Ceramic X5R" C_0805_2012 4671.75,1345.96 r45 top value=10uF
C722 "Ceramic X7R" C_0805_2012 4721.75,1295.96 r45 top value=10uF
C723 "Ceramic X7R" C_0805_2012 4160,1095 r135 top value=10uF
C724 "Ceramic X7R" C_0603_1608 4210,1130 r135 top value=100nF
C725 "Ceramic X7R" C_0603_1608 4185,905 r225 top value=100nF
C726 "Ceramic X7R" C_0805_2012 4105,855 r315 top value=10uF
C727 "Ceramic X5R" C_0603_1608 4042.8,1535.01 r225 top value=22uF
C728 "Ceramic X7R" C_0603_1608 4007.45,1570.37 r225 top value=100nF
C729 "Ceramic X5R" C_0603_1608 4205.44,1372.38 r225 top value=22uF
C730 "Ceramic X5R" C_0603_1608 4240.79,1337.02 r225 top value=22uF
C731 "Ceramic X7R" C_0603_1608 5000,395 r180 top value=100nF
C732 "Ceramic X7R" C_0603_1608 4238.11,1174.84 r135 top value=100nF
C733 "Ceramic X7R" C_0603_1608 4268.11,1204.84 r135 top value=100nF
C734 "Ceramic X7R" C_0603_1608 4298.11,1234.84 r135 top value=100nF
C735 "Ceramic X5R" C_0603_1608 4328.11,1264.84 r135 top value=22uF
C736 "Ceramic X5R" C_0603_1608 4604.84,1228.94 r45 top value=22uF
CON200 "Terminal for PE" TP_1-726388-2 2230.32,6531.5 r180 top value=1-726388-2
CON202 "Terminal for PE" TP_1-726388-2 2230.32,5723.43 r180 top value=1-726388-2
CON300 "Terminal for PE" TP_1-726388-2 4844.49,6622.05 r180 top value=1-726388-2
CON400 "112J-TDAR-R01" 112J-TDAR-R01 1793.15,356.26 r0 top
D200 "Green Led 0603" OL_0603_1608 4287.4,5104.33 r270 top value=LTST-C193TGKT-5A
D201 "Green Led 0603" OL_0603_1608 2987.06,4312.15 r270 top value=LTST-C193TGKT-5A
D202 "Green Led 0603" OL_0603_1608 2988.19,3677.17 r90 top value=LTST-C193TGKT-5A
D300 "USBLC6-4SC6" FP-SOT23-6L-MFG 5731.3,5920.28 r270 top locked value=3pF
FB100 "Ferrite bead" FB_0805_2012 3481.3,3877.95 r45 top value=11R@100M
FB101 "Ferrite bead" FB_0805_2012 3665.12,3907.28 r135 top value=11R@100M
FB200 "Ferrite bead" FB_0805_2012 2496.07,4875.68 r180 top value=11R@100M
FB201 "Ferrite bead" FB_0805_2012 2244.09,3791.34 r90 top value=11R@100M
FB300 "Ferrite bead" FB_0805_2012 5533.65,5916.27 r0 top value=11R@100M
FB400 "Ferrite bead" FB_0805_2012 1964.57,818.9 r270 top value=11R@100M
FB700 "Ferrite bead" FB_0805_2012 3964.57,1655.51 r315 top value=11R@100M
FL400 "EMIF06-MSD02N16" FP-EMIF06-MSD02N16-MFG 1749.84,839.57 r270 top
J500 "Micro-Match 16-pin" J_Micro-Match_2x8_THT 1748.59,2486.04 r180 top value=1-215079-6
J501 "Micro-Match 16-pin" J_Micro-Match_2x8_THT 2911.58,2486.04 r180 top value=1-215079-6
J700 "TFM-125-01-X-D-RE1-WT" SAMTEC_TFM-125-01-X-D-RE1-WT 4527.56,118.11 r180 top
JP100 "Solder Jumper 0603/1608" JP_0603_1608 5032.47,3728.7 r225 top value=-
JP200 "Solder Jumper 0603/1608" JP_0603_1608 4165.35,5220.47 r90 top value=-
JP300 "Solder Jumper 0603/1608" JP_0603_1608 6075.79,6062.99 r90 top value=-
JP301 "Solder Jumper 0603/1608" JP_0603_1608 5268.7,6370.07 r0 top value=-
JP302 "Solder Jumper 0603/1608" JP_0603_1608 5268.7,6472.44 r0 top value=-
JP303 "Solder Jumper 0603/1608" JP_0603_1608 6185.04,6439.37 r180 top value=-
L200 "3.3µH, 2.1A" WE-SPC_4828 2250.01,4275.29 r0 top
MOV200 "MOV" MOV_AXIAL_7.5_3.5 2392.72,6128.94 r270 top value=B72214P2301K103
MP200 "36702638" 36702638 2370.08,4523.62 r270 top locked
P100 "Goldpin" P_HEADER_1x5_2.54 5632.05,4415.2 r135 top value=DS1021-1*5SF1-1
R100 "Resistor" R_0402_1005 3727.53,4177.59 r135 top value=100k
R101 "Resistor" R_0603_1608 4587.62,4376.83 r225 top value=47k
R102 "Resistor" R_0603_1608 3774.1,3998.31 r315 top value=47R
R103 "Resistor" R_0402_1005 3939.09,4528.31 r45 top value=100k
R104 "Resistor" R_0402_1005 4744.09,4220.47 r225 top value=33R
R105 "Resistor" R_0402_1005 4720.47,4244.09 r225 top value=33R
R200 "Resistor" R_0603_1608 4287.4,5212.6 r270 top value=1k
R201 "Resistor" R_0603_1608 2987.06,4420.42 r270 top value=1k
R202 "Resistor" R_0603_1608 2988.19,3568.9 r90 top value=1k
R203 "Resistor" R_0402_1005 2535.44,4344.18 r180 top value=10k
R204 "Resistor" R_0402_1005 2555.13,4393.4 r90 top value=36k
R205 "Resistor" R_0402_1005 2515.76,4393.4 r270 top value=10k
R206 "Resistor" R_0402_1005 2379.92,3520.67 r0 top value=10k
R300 "Resistor" R_0402_1005 5716.54,5799.21 r90 bottom value=51R
R301 "Resistor" R_0402_1005 5687.01,5799.21 r90 bottom value=51R
R302 "Resistor" R_0402_1005 5775.59,5799.21 r90 bottom value=51R
R303 "Resistor" R_0402_1005 5746.06,5799.21 r90 bottom value=51R
R304 "Resistor" R_0402_1005 5889.76,5500 r270 top value=33R
R305 "Resistor" R_0402_1005 5822.83,5425.2 r270 top value=33R
R306 "Resistor" R_0402_1005 5622.05,5425.2 r270 top value=33R
R307 "Resistor" R_0402_1005 5551.18,5425.2 r270 top value=33R
R308 "Resistor" R_0402_1005 5657.48,5425.2 r90 top value=10k
R309 "Resistor" R_0402_1005 5586.61,5425.2 r90 top value=10k
R310 "Resistor" R_0402_1005 5757.8,5494.09 r90 top value=10k
R311 "Resistor" R_0402_1005 5787.8,5425.2 r90 top value=10k
R312 "Resistor" R_0603_1608 5168.31,6232.48 r0 top value=470R
R313 "Resistor" R_0603_1608 5168.31,6182.87 r0 top value=470R
R314 "Resistor" R_0402_1005 5889.76,5551.69 r180 top value=10k
R315 "Resistor" R_0402_1005 5822.8,5494.09 r90 top value=1.5k
R316 "Resistor" R_0603_1608 5947.05,5581.69 r270 top value=2.2k
R317 "Resistor" R_0402_1005 5889.76,5581.69 r180 top value=10k
R318 "Resistor" R_0603_1608 5573.82,5765.71 r0 top value=12k
R319 "Resistor" R_1206_3216 4941.93,6427.17 r270 top value=330k
R320 "Resistor" R_1206_3216 4941.93,6237.2 r270 top value=330k
R321 "Resistor" R_1206_3216 4941.93,6036.42 r270 top value=330k
R500 "Resistor" R_0603_1608 1976.71,2666.05 r0 top value=4.7k
R501 "Resistor" R_0603_1608 1976.71,2616.05 r180 top value=4.7k
R502 "Resistor" R_0603_1608 1723.6,2656.05 r270 top value=22R
R503 "Resistor" R_0603_1608 1623.6,2656.05 r270 top value=22R
R504 "Resistor" R_0603_1608 1523.6,2656.05 r270 top value=22R
R505 "Resistor" R_0603_1608 1823.6,2656.05 r270 top value=22R
R506 "Resistor" R_0603_1608 1923.6,2746.05 r270 top value=22R
R507 "Resistor" R_0603_1608 2023.6,2746.05 r270 top value=22R
R508 "Resistor" R_0603_1608 2687.01,2660.43 r270 top value=22R
R509 "Resistor" R_0603_1608 2787.01,2660.43 r270 top value=22R
R510 "Resistor" R_0603_1608 2887.01,2660.43 r270 top value=22R
R511 "Resistor" R_0603_1608 2987.01,2660.43 r270 top value=22R
R512 "Resistor" R_0603_1608 3087.01,2660.43 r270 top value=22R
R513 "Resistor" R_0603_1608 3187.01,2660.43 r270 top value=22R
R514 "Resistor" R_0603_1608 2836.59,2297.24 r90 top value=22R
R515 "Resistor" R_0603_1608 2736.59,2297.24 r90 top value=22R
R516 "Resistor" R_0603_1608 2636.59,2297.24 r90 top value=22R
R517 "Resistor" R_0603_1608 2934.84,2297.24 r90 top value=22R
R518 "Resistor" R_0603_1608 3034.84,2297.24 r90 top value=22R
R519 "Resistor" R_0603_1608 3134.84,2297.24 r90 top value=22R
R700 "Resistor" R_0402_1005 4641.89,1186.89 r225 top value=100k
R701 "Resistor" R_0603_1608 4150,935 r45 top value=1R
R702 "Resistor" R_0603_1608 5125,436.46 r90 top value=22R
R703 "Resistor" R_0603_1608 5080,436.46 r90 top value=22R
R704 "Resistor" R_0603_1608 5215,436.46 r90 top value=22R
R705 "Resistor" R_0603_1608 5170,436.46 r90 top value=22R
T300 "7499011121A" 7499011121A 5708.66,6559.45 r180 top locked
TP200 "Test loop THT" TP_KEYSTONE_5000_RED 4286.61,4990.16 r0 top value=5000
TP201 "Test loop THT" TP_KEYSTONE_5001_BLACK 4287.4,5324.8 r90 top value=5001
TP202 "Test loop THT" TP_KEYSTONE_5000_RED 2987.06,4194.04 r270 top value=5000
TP203 "Test loop THT" TP_KEYSTONE_5001_BLACK 2988.22,4538.53 r270 top value=5001
TP204 "Test loop THT" TP_KEYSTONE_5000_RED 2988.19,3795.28 r270 top value=5000
TP205 "Test loop THT" TP_KEYSTONE_5001_BLACK 2988.19,3440.94 r90 top value=5001
U100 "STM32H563ZIT6" QFP50P2200X2200X160-144N 4369.1,3838.31 r315 top
U101 "MX25L25645GZNI-08G" SOIC-8-4X5X18 3749.1,4448.31 r225 top
U200 "IRM-05-5" CONV_IRM-05-5 3466.54,6113.19 r0 top
U201 "+" SOT563-Z6_1_DIO 2437.02,4344.18 r0 top
U202 "ST1L05CPU33R" DFN6D_N 2468.5,3628.94 r90 top
U300 "LAN8742A-CZ-TR" FP-C04-143B-S4QFN-MFG 5731.3,5646.65 r0 top
U700 "LTC2983HLX#PBF" FP-LX-48-05-08-1760-MFG 4450,1010 r315 top
U701 "ADP150AUJZ-3.3-R7" ADI-UJ-5_M 4120,1440 r315 top
X100 "32 MHz Oscilator" X_2x1.6_4PIN 3895.8,4168.85 r225 top value=25MHz
X300 "32 MHz Oscilator" X_2x1.6_4PIN 5466.73,5632.83 r270 top value=25MHz

## Footprints (in the part's own frame and the unit in brackets; to place one, negate y for a bottom-side part, rotate by r counter-clockwise, add the part's x,y. Pads: shape width x height; smd on the part's side, far side on the other; paste and mask are expansions set on the pad)
112J-TDAR-R01 [mm] "ATTEN 112J-TDAR-R01 uSD-Card Micro-SD connector"
  rect 0.7x1.6 smd: 1(2.726,5.978) 2(1.626,5.978) 3(0.526,5.978) 4(-0.574,5.978) 5(-1.674,5.978) 6(-2.774,5.978) 7(-3.874,5.978) 8(-4.974,5.978) 9(-6.074,5.978)
  rect 1.2x1.4 smd: 10(-7.274,5.478)
  rect 1.6x1.4 smd: 11(7.326,5.478)
  rect 1.2x2.2 smd: 12(-7.274,-4.122) 13(8.226,-4.122)
  Top Layer keep-out region: -5.424,1.978 3.476,1.978 3.495,1.974 3.511,1.963 3.522,1.947 3.526,1.928 3.526,1.928 3.526,0.028 3.522,0.009 3.511,-0.007 3.495,-0.018 3.476,-0.022 3.476,-0.022 -5.424,-0.022 -5.443,-0.018 -5.459,-0.007 -5.47,0.009 -5.474,0.028 -5.474,0.028 -5.474,1.928 -5.47,1.947 -5.459,1.963 -5.443,1.974 -5.424,1.978
  Keep-Out Layer board cut-out: 4.026,-4.522 3.976,-4.739 3.838,-4.913 3.637,-5.009 3.415,-5.009 3.214,-4.913 3.076,-4.739 3.026,-4.522 3.026,-4.522 3.076,-4.305 3.214,-4.131 3.415,-4.035 3.637,-4.035 3.838,-4.131 3.976,-4.305 4.026,-4.522
  Keep-Out Layer board cut-out: -3.974,-4.522 -4.024,-4.739 -4.162,-4.913 -4.363,-5.009 -4.585,-5.009 -4.786,-4.913 -4.924,-4.739 -4.974,-4.522 -4.974,-4.522 -4.924,-4.305 -4.786,-4.131 -4.585,-4.035 -4.363,-4.035 -4.162,-4.131 -4.024,-4.305 -3.974,-4.522
  Keep-Out Layer circle w0.025: c3.526,-4.522 r0.5
  Keep-Out Layer circle w0.025: c-4.474,-4.522 r0.5
  Keep-Out Layer region: 4.026,-4.522 3.976,-4.739 3.838,-4.913 3.637,-5.009 3.415,-5.009 3.214,-4.913 3.076,-4.739 3.026,-4.522 3.026,-4.522 3.076,-4.305 3.214,-4.131 3.415,-4.035 3.637,-4.035 3.838,-4.131 3.976,-4.305 4.026,-4.522
  Keep-Out Layer region: -3.974,-4.522 -4.024,-4.739 -4.162,-4.913 -4.363,-5.009 -4.585,-5.009 -4.786,-4.913 -4.924,-4.739 -4.974,-4.522 -4.974,-4.522 -4.924,-4.305 -4.786,-4.131 -4.585,-4.035 -4.363,-4.035 -4.162,-4.131 -4.024,-4.305 -3.974,-4.522
  silkscreen extent -6.72,-8.32 7.68,5.28, body extent -7.61,-8.56 8.49,6.44, height 1.85
36702638 [mm] "Shielding Cabinet, SMT Frame Seamless, 26.3x19.8x8.1mm"
  rect 1x14 smd paste-2539.97 mask-2222: 1(-13,0) 1(13,0)
  rect 18x1 smd paste-2539.97 mask-2222: 1(0,9.75) 1(0,-9.75)
  Top Layer region: -13.75,-1 -13.75,6.9 -13.476,8.278 -12.696,9.446 -11.528,10.226 -10.15,10.5 -10.15,10.5 10.15,10.5 11.528,10.226 12.696,9.446 13.476,8.278 13.75,6.9 13.75,6.9 13.75,-1 12.25,-1 12.25,6.9 12.09,7.704 11.635,8.385 10.954,8.84 10.15,9 10.15,9 -10.15,9 -10.954,8.84 -11.635,8.385 -12.09,7.704 -12.25,6.9 -12.25,6.9 -12.25,-1
  Top Layer region: -13.75,-0.25 -13.75,-6.9 -13.476,-8.278 -12.696,-9.446 -11.528,-10.226 -10.15,-10.5 -10.15,-10.5 10.15,-10.5 11.528,-10.226 12.696,-9.446 13.476,-8.278 13.75,-6.9 13.75,-6.9 13.75,-0.25 12.25,-0.25 12.25,-6.9 12.09,-7.704 11.635,-8.385 10.954,-8.84 10.15,-9 10.15,-9 -10.15,-9 -10.954,-8.84 -11.635,-8.385 -12.09,-7.704 -12.25,-6.9 -12.25,-6.9 -12.25,-0.25
  body extent -13.15,-9.9 13.15,9.9, height 8.1
7499011121A [mm] "LAN Transformer, body 21.84x15.88mm"
  rrect50% 1.4x1.4 hole 0.9: 1(-4.445,6.35)
  round 1.4 hole 0.9: 2(-3.175,8.89) 3(-1.905,6.35) 4(-0.635,8.89) 5(0.635,6.35) 6(1.905,8.89) 7(3.175,6.35) 8(4.445,8.89)
  round 1.53 hole 1.03: 9(-6.63,-4.08) 10(-4.09,-4.08) 11(4.09,-4.08) 12(6.63,-4.08)
  round 3.25 hole 3.25 unplated: MH1(-5.715,0) MH2(5.715,0)
  round 2.4 hole 1.6: Shell(-7.745,3.05) Shell(7.745,3.05)
  silkscreen extent -9.3,-10.89 9.3,10.36, body extent -9.35,-10.89 9.35,10.36, height 14.9
ADI-UJ-5_M [mm] "SOT23, 5-Leads, Body 2.9x1.6mm, Pitch 0.95mm, IPC Low Density"
  rect 1.15x0.7 smd: 1(-1.225,0.95) 2(-1.225,0) 3(-1.225,-0.95) 4(1.225,-0.95) 5(1.225,0.95)
  silkscreen extent -1.35,-1.45 0.25,1.97, body extent -0.8,-1.45 0.8,1.45, height 1
C_0402_1005 [mm]
  rect 0.52x0.56 smd: 1(-0.39,0) 2(0.39,0)
  silkscreen extent 0,-0.25 0,0.25, body extent -0.52,-0.27 0.53,0.28, height 0.55
C_0603_1608 [mm]
  rect 0.75x0.8 smd: 1(-0.725,0) 2(0.725,0)
  silkscreen extent 0,-0.38 0,0.38, body extent -0.85,-0.45 0.85,0.45, height 0.89
C_0805_2012 [mil]
  rect 42x55 smd: 1(-35,0) 2(35,0)
  silkscreen extent 0,-25 0,25, body extent -43,-29 43,29, height 53
C_1210_3225 [mil]
  rect 54x120 smd: 1(-60,0) 2(60,0)
  silkscreen extent -20,-55 20,55, body extent -72,-55 70,55, height 106
C_NC_0805_2012 [mil]
  rect 42x55 smd: 1(-35,0) 2(35,0)
  silkscreen extent 0,-25 0,25, body extent -43,-29 43,29, height 53
CONV_IRM-05-5 [mm]
  round 1.86 hole 1.24: AC/L(-19.25,-9.25) AC/N(-19.25,1.5) VNEG(19.25,-9.25) VPOS(19.25,-1.25)
  silkscreen extent -22.85,-12.7 22.85,12.7, body extent -22.85,-12.7 22.85,12.7, height 21.5
DFN6D_N [mm] "SON, 6-Leads, Body 3x3mm, Pitch 0.95mm, Thermal Pad 2.4x1.65mm, IPC Medium Density"
  oval 0.8x0.4 smd: 1(-1.475,0.95) 2(-1.475,0) 3(-1.475,-0.95) 4(1.475,-0.95) 5(1.475,0) 6(1.475,0.95)
  rect 1.65x2.4 smd: 7(0,0)
  silkscreen extent -2.15,-1.7 1.7,1.75, body extent -1.55,-1.55 1.55,1.55, height 0.95
FB_0805_2012 [mil]
  rect 42x55 smd: 1(-35,0) 2(35,0)
  silkscreen extent 0,-25 0,25, body extent -39,-24 39,24, height 35
FP-C04-143B-S4QFN-MFG [mm]
  rrect100% 0.85x0.3 smd paste+0 mask+0: 1(-1.95,1.25) 2(-1.95,0.75) 3(-1.95,0.25) 4(-1.95,-0.25) 5(-1.95,-0.75) 6(-1.95,-1.25) 13(1.95,-1.25) 14(1.95,-0.75) 15(1.95,-0.25) 16(1.95,0.25) 17(1.95,0.75) 18(1.95,1.25)
  rrect100% 0.3x0.85 smd paste+0 mask+0: 7(-1.25,-1.95) 8(-0.75,-1.95) 9(-0.25,-1.95) 10(0.25,-1.95) 11(0.75,-1.95) 12(1.25,-1.95) 19(1.25,1.95) 20(0.75,1.95) 21(0.25,1.95) 22(-0.25,1.95) 23(-0.75,1.95) 24(-1.25,1.95)
  rect 2.6x2.6 smd paste+0 mask+0: 25(0,0)
  silkscreen extent -2.6,-2.05 2.05,2.35, body extent -2.47,-2.47 2.47,2.47, height 0.25
FP-EMIF06-MSD02N16-MFG [mm]
  rect 0.45x0.2 smd paste-1000 mask+0: 1(-0.575,1.4) 2(-0.575,1) 3(-0.575,0.6) 4(-0.575,0.2) 5(-0.575,-0.2) 6(-0.575,-0.6) 7(-0.575,-1) 8(-0.575,-1.4) 9(0.575,-1.4) 10(0.575,-1) 11(0.575,-0.6) 12(0.575,-0.2) 13(0.575,0.2) 14(0.575,0.6) 15(0.575,1) 16(0.575,1.4)
  rect 0.3x2.8 smd paste-1000 mask+0: 17(0,0)
  silkscreen extent -1.47,-2 0.9,2, body extent -0.9,-1.88 0.9,1.88, height 0.25
FP-LX-48-05-08-1760-MFG [mm]
  rect 1.3x0.25 smd paste+0 mask+0: 1(-4.25,2.75) 2(-4.25,2.25) 3(-4.25,1.75) 4(-4.25,1.25) 5(-4.25,0.75) 6(-4.25,0.25) 7(-4.25,-0.25) 8(-4.25,-0.75) 9(-4.25,-1.25) 10(-4.25,-1.75) 11(-4.25,-2.25) 12(-4.25,-2.75) 25(4.25,-2.75) 26(4.25,-2.25) 27(4.25,-1.75) 28(4.25,-1.25) 29(4.25,-0.75) 30(4.25,-0.25) 31(4.25,0.25) 32(4.25,0.75) 33(4.25,1.25) 34(4.25,1.75) 35(4.25,2.25) 36(4.25,2.75)
  rect 0.25x1.3 smd paste+0 mask+0: 13(-2.75,-4.25) 14(-2.25,-4.25) 15(-1.75,-4.25) 16(-1.25,-4.25) 17(-0.75,-4.25) 18(-0.25,-4.25) 19(0.25,-4.25) 20(0.75,-4.25) 21(1.25,-4.25) 22(1.75,-4.25) 23(2.25,-4.25) 24(2.75,-4.25) 37(2.75,4.25) 38(2.25,4.25) 39(1.75,4.25) 40(1.25,4.25) 41(0.75,4.25) 42(0.25,4.25) 43(-0.25,4.25) 44(-0.75,4.25) 45(-1.25,4.25) 46(-1.75,4.25) 47(-2.25,4.25) 48(-2.75,4.25)
  silkscreen extent -4.42,-3 3,3.67, body extent -5,-5 5,5, height 0.25
FP-SOT23-6L-MFG [mm]
  rect 1.2x0.6 smd paste+0 mask+0: 1(-1.15,0.95) 2(-1.15,0) 3(-1.15,-0.95) 4(1.15,-0.95) 5(1.15,0) 6(1.15,0.95)
  silkscreen extent -2.52,-1.53 0.18,1.53, body extent -1.85,-1.63 1.85,1.63, height 0.25
J_Micro-Match_2x8_THT [mm] "Connector; Micro-Match"
  rrect50% 1.6x1.6 hole 0.83: 1(9.525,1.27)
  round 1.6 hole 0.83: 2(8.255,-1.27) 3(6.985,1.27) 4(5.715,-1.27) 5(4.445,1.27) 6(3.175,-1.27) 7(1.905,1.27) 8(0.635,-1.27) 9(-0.635,1.27) 10(-1.905,-1.27) 11(-3.175,1.27) 12(-4.445,-1.27) 13(-5.715,1.27) 14(-6.985,-1.27) 15(-8.255,1.27) 16(-9.525,-1.27)
  round 1.5 hole 1.8 unplated: DNC(10.922,-0.508)
  silkscreen extent -11.18,-2.54 11.18,2.54, body extent -11.09,-2.5 11.09,2.5, height 4.05
JP_0603_1608 [mil]
  round 1 smd: 1(21.65,0) 2(-22.64,0)
  Top Layer region: 7.87,-15.75 0,0 7.87,15.75 43.31,15.75 43.31,-15.75
  Top Layer region: -43.31,-15.75 -1.97,-15.75 -9.84,0 -1.97,15.75 -43.31,15.75
  body extent -34,-19 34,19, height 21
MOV_AXIAL_7.5_3.5 [mm]
  round 1.8 hole 1: 1(3.75,-1.75) 2(-3.75,1.75)
  silkscreen extent -6.74,-2.95 6.76,2.95, body extent -6.75,-2.95 6.75,2.95, height 1.99
OL_0603_1608 [mm]
  rect 0.8x0.8 smd: 1(-0.75,0) 2(0.75,0)
  silkscreen extent -0.11,-0.21 0.1,0.21, body extent -0.8,-0.4 0.8,0.4, height 0.75
P_HEADER_1x5_2.54 [mm] "Connector; Header; 5 Position, Male"
  rect 1.5x1.5 hole 0.9: 1(-5.08,0)
  round 1.5 hole 0.9: 2(-2.54,0) 3(0,0) 4(2.54,0) 5(5.08,0)
  silkscreen extent -6.35,-1.27 6.35,1.27, body extent -6.25,-1.25 6.45,1.25, height 8.2
QFP50P2200X2200X160-144N [mm]
  rrect25% 1.47x0.28 smd: 1(-10.67,8.75) 2(-10.67,8.25) 3(-10.67,7.75) 4(-10.67,7.25) 5(-10.67,6.75) 6(-10.67,6.25) 7(-10.67,5.75) 8(-10.67,5.25) 9(-10.67,4.75) 10(-10.67,4.25) 11(-10.67,3.75) 12(-10.67,3.25) 13(-10.67,2.75) 14(-10.67,2.25) 15(-10.67,1.75) 16(-10.67,1.25) 17(-10.67,0.75) 18(-10.67,0.25) 19(-10.67,-0.25) 20(-10.67,-0.75) 21(-10.67,-1.25) 22(-10.67,-1.75) 23(-10.67,-2.25) 24(-10.67,-2.75) 25(-10.67,-3.25) 26(-10.67,-3.75) 27(-10.67,-4.25) 28(-10.67,-4.75) 29(-10.67,-5.25) 30(-10.67,-5.75) 31(-10.67,-6.25) 32(-10.67,-6.75) 33(-10.67,-7.25) 34(-10.67,-7.75) 35(-10.67,-8.25) 36(-10.67,-8.75) 73(10.67,-8.75) 74(10.67,-8.25) 75(10.67,-7.75) 76(10.67,-7.25) 77(10.67,-6.75) 78(10.67,-6.25) 79(10.67,-5.75) 80(10.67,-5.25) 81(10.67,-4.75) 82(10.67,-4.25) 83(10.67,-3.75) 84(10.67,-3.25) 85(10.67,-2.75) 86(10.67,-2.25) 87(10.67,-1.75) 88(10.67,-1.25) 89(10.67,-0.75) 90(10.67,-0.25) 91(10.67,0.25) 92(10.67,0.75) 93(10.67,1.25) 94(10.67,1.75) 95(10.67,2.25) 96(10.67,2.75) 97(10.67,3.25) 98(10.67,3.75) 99(10.67,4.25) 100(10.67,4.75) 101(10.67,5.25) 102(10.67,5.75) 103(10.67,6.25) 104(10.67,6.75) 105(10.67,7.25) 106(10.67,7.75) 107(10.67,8.25) 108(10.67,8.75)
  rrect25% 0.28x1.47 smd: 37(-8.75,-10.67) 38(-8.25,-10.67) 39(-7.75,-10.67) 40(-7.25,-10.67) 41(-6.75,-10.67) 42(-6.25,-10.67) 43(-5.75,-10.67) 44(-5.25,-10.67) 45(-4.75,-10.67) 46(-4.25,-10.67) 47(-3.75,-10.67) 48(-3.25,-10.67) 49(-2.75,-10.67) 50(-2.25,-10.67) 51(-1.75,-10.67) 52(-1.25,-10.67) 53(-0.75,-10.67) 54(-0.25,-10.67) 55(0.25,-10.67) 56(0.75,-10.67) 57(1.25,-10.67) 58(1.75,-10.67) 59(2.25,-10.67) 60(2.75,-10.67) 61(3.25,-10.67) 62(3.75,-10.67) 63(4.25,-10.67) 64(4.75,-10.67) 65(5.25,-10.67) 66(5.75,-10.67) 67(6.25,-10.67) 68(6.75,-10.67) 69(7.25,-10.67) 70(7.75,-10.67) 71(8.25,-10.67) 72(8.75,-10.67) 109(8.75,10.67) 110(8.25,10.67) 111(7.75,10.67) 112(7.25,10.67) 113(6.75,10.67) 114(6.25,10.67) 115(5.75,10.67) 116(5.25,10.67) 117(4.75,10.67) 118(4.25,10.67) 119(3.75,10.67) 120(3.25,10.67) 121(2.75,10.67) 122(2.25,10.67) 123(1.75,10.67) 124(1.25,10.67) 125(0.75,10.67) 126(0.25,10.67) 127(-0.25,10.67) 128(-0.75,10.67) 129(-1.25,10.67) 130(-1.75,10.67) 131(-2.25,10.67) 132(-2.75,10.67) 133(-3.25,10.67) 134(-3.75,10.67) 135(-4.25,10.67) 136(-4.75,10.67) 137(-5.25,10.67) 138(-5.75,10.67) 139(-6.25,10.67) 140(-6.75,10.67) 141(-7.25,10.67) 142(-7.75,10.67) 143(-8.25,10.67) 144(-8.75,10.67)
  silkscreen extent -12.44,-10 10,10, body extent -11,-11 11,11, height 0.72
R_0402_1005 [mm] "Chip Resistor, 2-Leads, Body 1.00x0.50mm, IPC High Density"
  rect 0.45x0.55 smd: 1(-0.45,0) 2(0.45,0)
  silkscreen extent 0,-0.3 0,0.3, body extent -0.53,-0.28 0.53,0.28, height 0.37
R_0603_1608 [mm]
  rect 0.75x0.8 smd: 1(-0.725,0) 2(0.725,0)
  silkscreen extent 0,-0.38 0,0.38, body extent -0.87,-0.47 0.88,0.48, height 0.54
R_1206_3216 [mm] "Chip Resistor, 2-Leads, Body 3.10x1.60mm, IPC Medium Density"
  rect 1.3x1.75 smd: 1(-1.4,0) 2(1.4,0)
  silkscreen extent -0.35,-0.77 0.35,0.77, body extent -1.6,-0.85 1.6,0.85, height 0.65
SAMTEC_TFM-125-01-X-D-RE1-WT [mm]
  rect 1.07x1.07 / inner round 1.07 / far side rect 1.07x1.07 hole 0.635: 01(15.24,-3.43)
  round 1.07 hole 0.635: 02(15.24,-5.335) 03(13.97,-3.43) 04(13.97,-5.335) 05(12.7,-3.43) 06(12.7,-5.335) 07(11.43,-3.43) 08(11.43,-5.335) 09(10.16,-3.43) 10(10.16,-5.335) 11(8.89,-3.43) 12(8.89,-5.335) 13(7.62,-3.43) 14(7.62,-5.335) 15(6.35,-3.43) 16(6.35,-5.335) 17(5.08,-3.43) 18(5.08,-5.335) 19(3.81,-3.43) 20(3.81,-5.335) 21(2.54,-3.43) 22(2.54,-5.335) 23(1.27,-3.43) 24(1.27,-5.335) 25(0,-3.43) 26(0,-5.335) 27(-1.27,-3.43) 28(-1.27,-5.335) 29(-2.54,-3.43) 30(-2.54,-5.335) 31(-3.81,-3.43) 32(-3.81,-5.335) 33(-5.08,-3.43) 34(-5.08,-5.335) 35(-6.35,-3.43) 36(-6.35,-5.335) 37(-7.62,-3.43) 38(-7.62,-5.335) 39(-8.89,-3.43) 40(-8.89,-5.335) 41(-10.16,-3.43) 42(-10.16,-5.335) 43(-11.43,-3.43) 44(-11.43,-5.335) 45(-12.7,-3.43) 46(-12.7,-5.335) 47(-13.97,-3.43) 48(-13.97,-5.335) 49(-15.24,-3.43) 50(-15.24,-5.335)
  round 1.413 hole 0.813: S1(17.83,-0.96) S2(17.83,1.3) S3(-17.83,-0.96) S4(-17.83,1.3)
  silkscreen extent -19.22,-3.73 19.22,2.92, body extent -19.22,-5.46 19.22,3.18, height 6.49
SOIC-8-4X5X18 [mm]
  rrect50% 1.55x0.6 smd: 1(-2.7,1.905) 2(-2.7,0.635) 3(-2.7,-0.635) 4(-2.7,-1.905) 5(2.7,-1.905) 6(2.7,-0.635) 7(2.7,0.635) 8(2.7,1.905)
  silkscreen extent -2.65,-2.5 1.52,3.16, body extent -3,-2.45 3,2.45, height 1.7
SOT563-Z6_1_DIO [mil]
  rect 24x10 smd paste+0 mask+0: 1(-33.5,19.68) 2(-33.5,0) 3(-33.5,-19.68) 4(33.5,-19.69) 5(33.5,0) 6(33.5,19.68)
  silkscreen extent -71,-38 30,39
TP_1-726388-2 [mm] "Testpoint; 2 Pin;"
  round 2.3 hole 1.5: 1(-2.54,0) 1(2.54,0)
  silkscreen extent -4.19,-1.65 4.19,1.66, body extent -3.17,-0.42 3.17,0.38, height 9.5
TP_KEYSTONE_5000_RED [mil] "Testpoint; 1 Pin;"
  round 70 hole 40: 1(0,0)
  body extent -50,-50 50,50, height 180
TP_KEYSTONE_5001_BLACK [mil] "Testpoint; 1 Pin;"
  round 70 hole 40: 1(0,0)
  body extent -50,-50 50,50, height 180
WCAP-ATG5_D8H20 [mm] "Aluminum Electrolytic Capacitors, 8x20mm"
  rrect50% 1.4x1.4 hole 0.9: 1(1.75,0)
  round 1.4 hole 0.9: 2(-1.75,0)
  silkscreen extent -4.25,-4.25 4.25,4.25, body extent -3.99,-4 4,4, height 20.31
WE-SPC_4828 [mm] "SMD Shielded Power Inductor, body 4.8x4.8mm"
  rect 5.3x2 smd: 1(0,1.75) 2(0,-1.75)
  silkscreen extent -3.22,-0.45 2.55,1.82, body extent -2.41,-2.41 2.41,2.41, height 2.8
X_2x1.6_4PIN [mm] "Crystal resonator; 2.0mm x 1.6mm"
  rect 0.875x0.775 smd: 1(-0.637,-0.488) 2(0.637,-0.487) 3(0.637,0.488) 4(-0.638,0.488)
  silkscreen extent -0.97,-1.25 0.4,1.04, body extent -1,-0.8 1,0.8, height 0.59